# Altium PCB PcbDoc_JavierLopezIniesta_RodrigoMoratilla.PcbDoc (part 1 of 2)
Units mm, origin at the board's own origin, x right, y up, seen from the top; angles counter-clockwise.
Board outline 50 x 50 mm, 4 copper layers (Top Layer, Int1 (GND), Int2 (PWR), Bottom Layer), stack 1.369 mm thick; 104 components, 112 nets, 568 pads, 286 vias.
Unrouted connection lines stored in the file: 2.
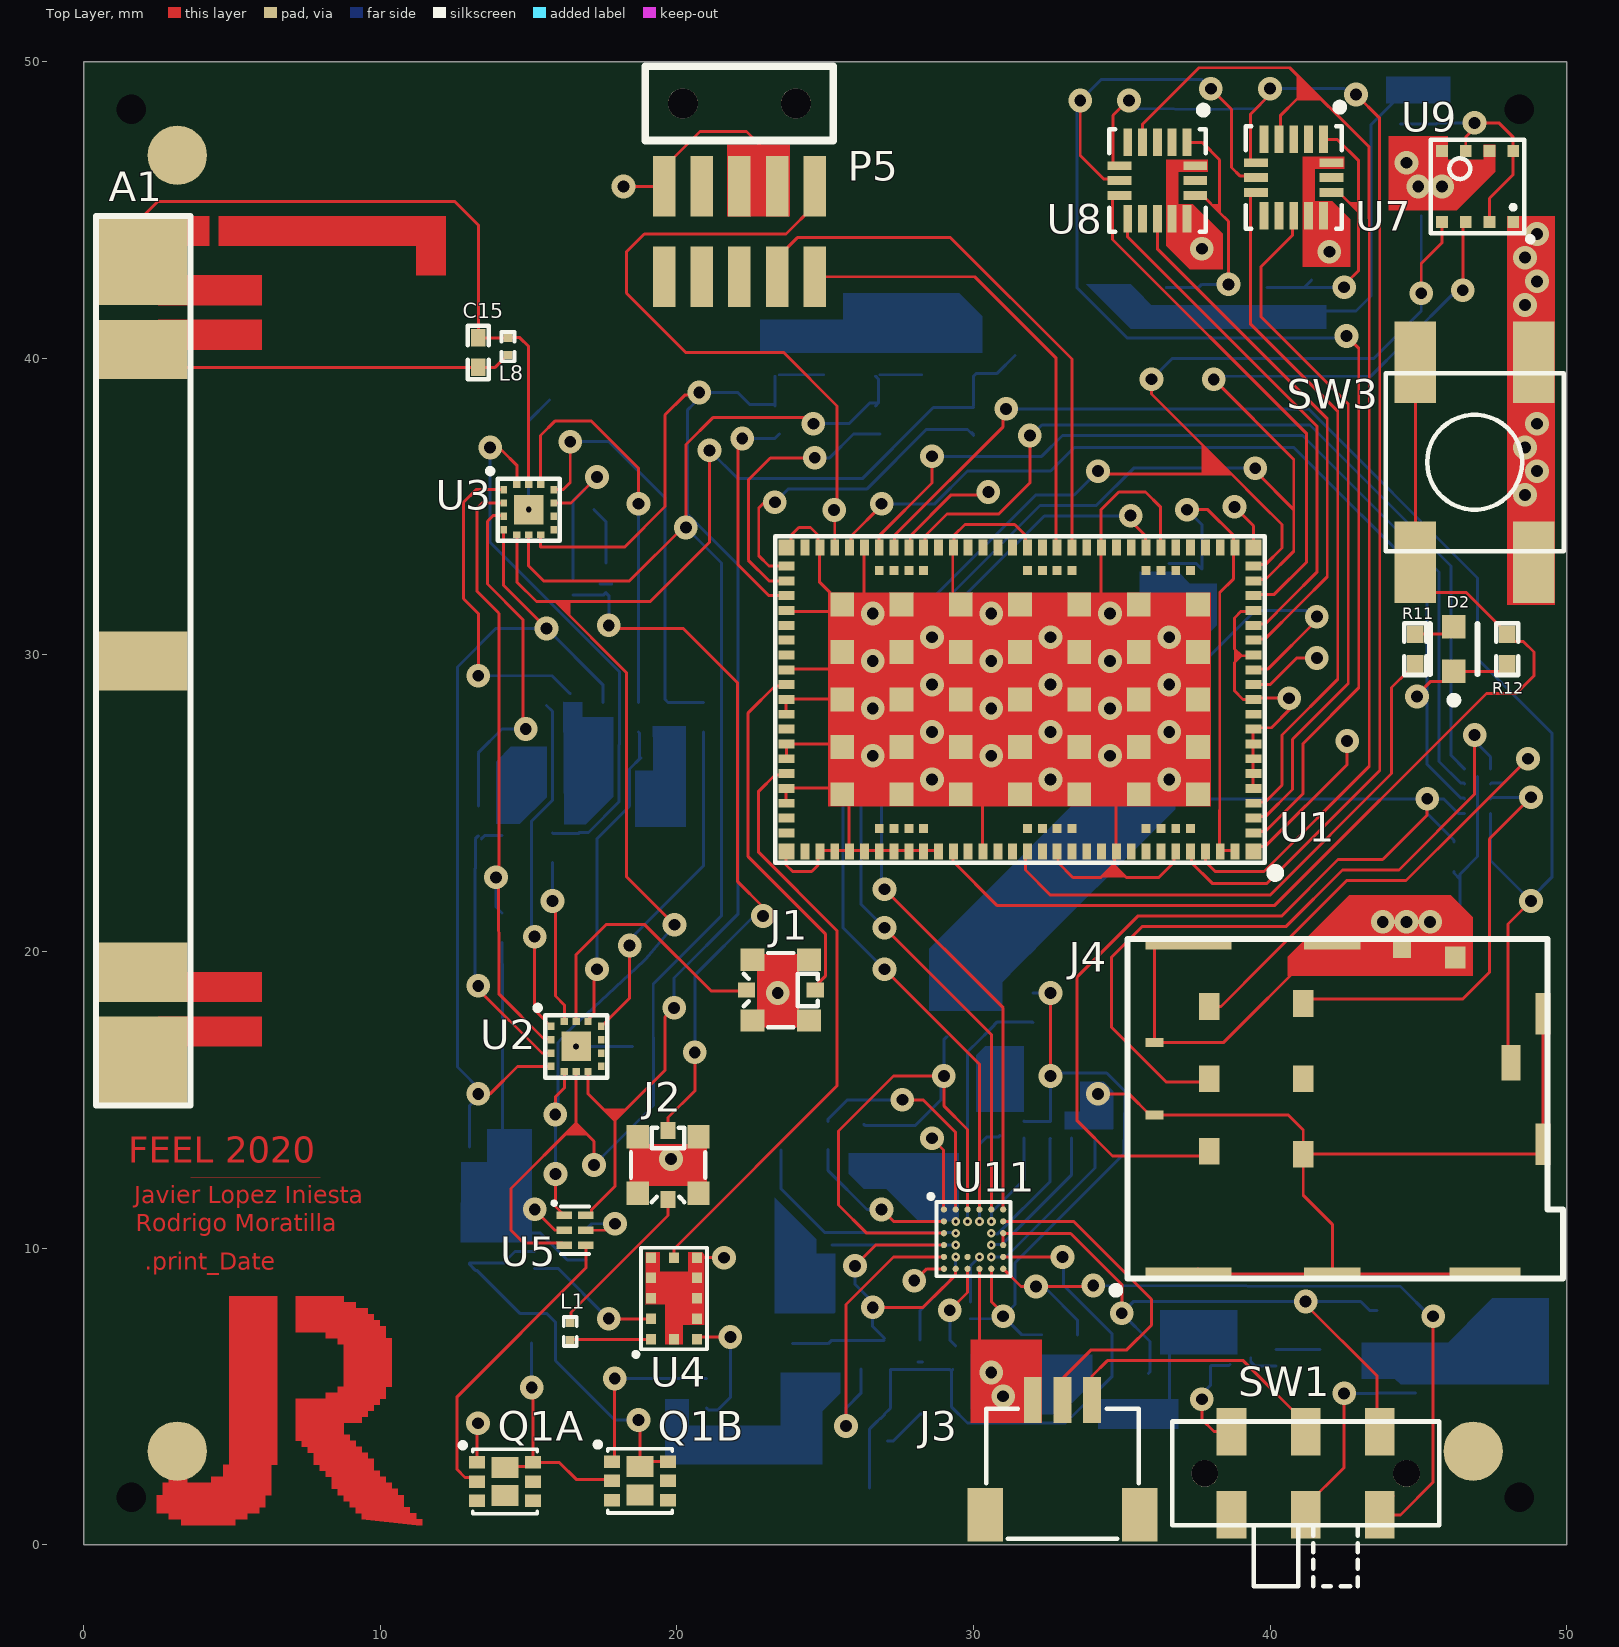
[diagram p0: Top Layer view]
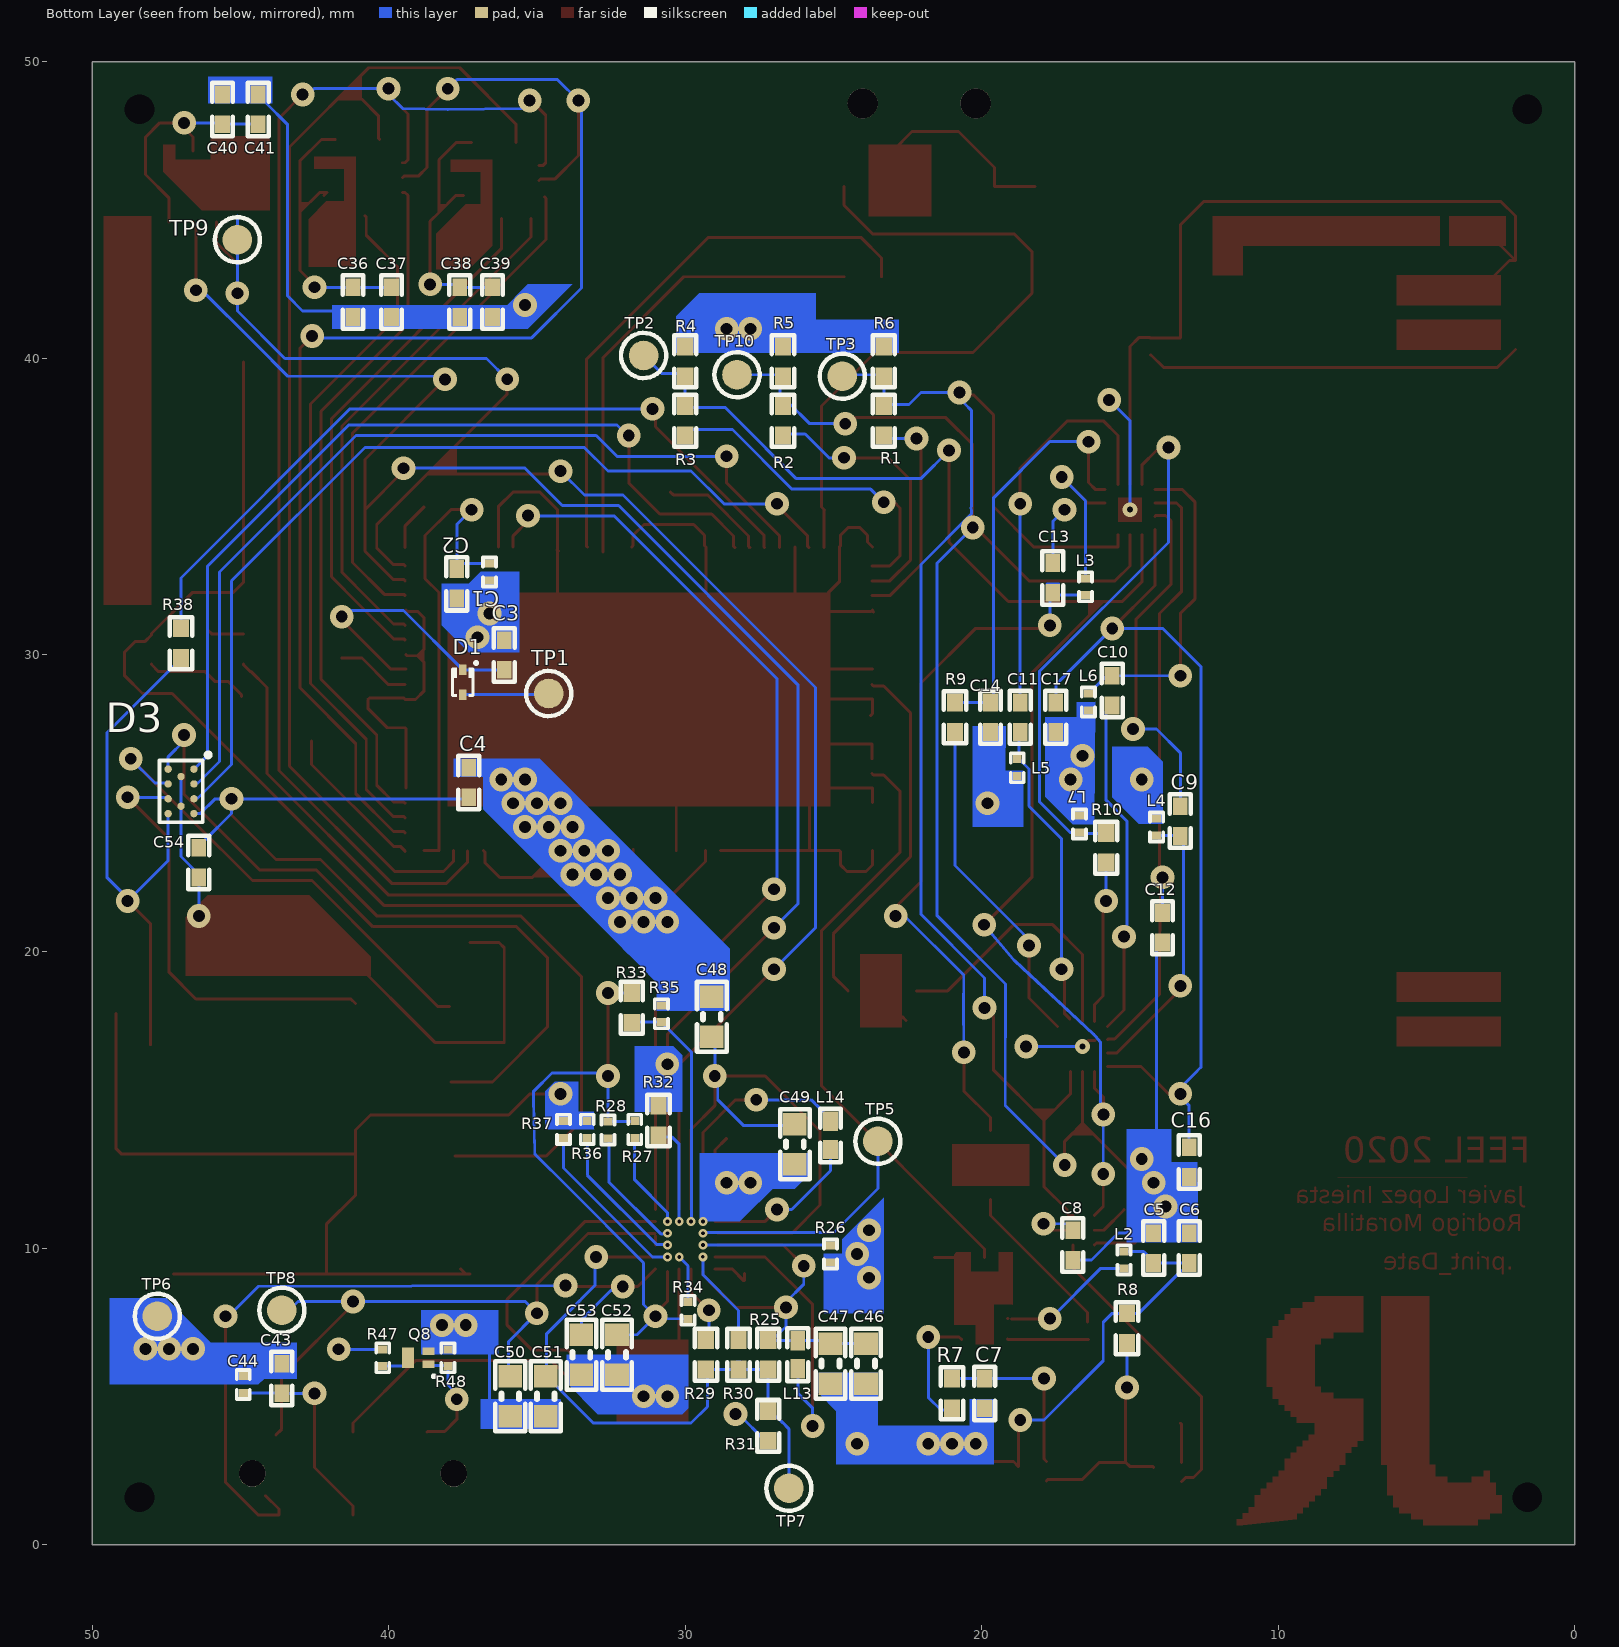
[diagram p1: Bottom Layer view, seen from below]
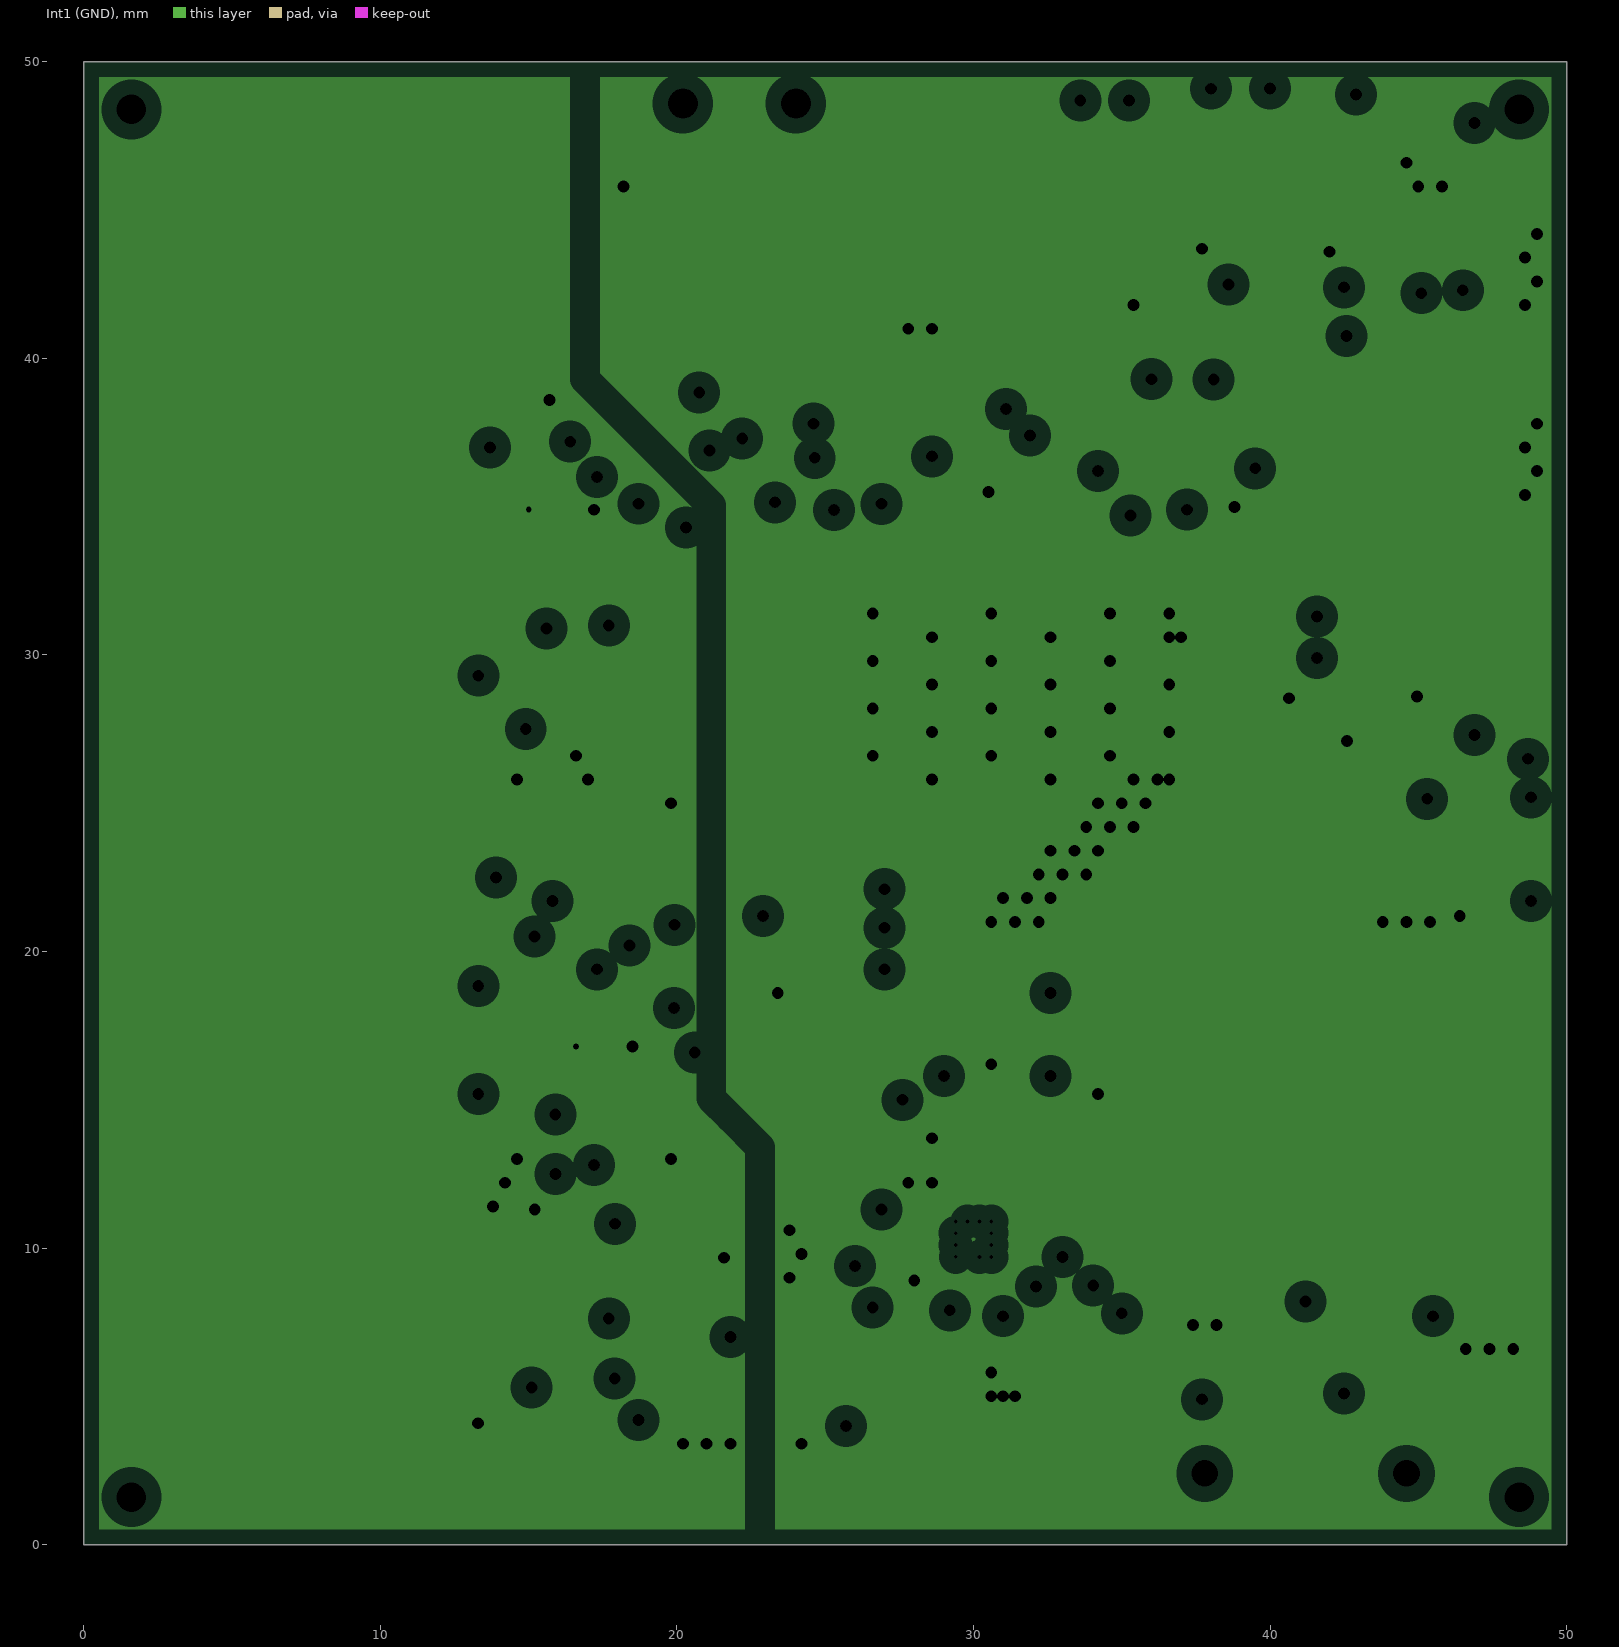
[diagram p2: Int1 (GND), clearances drawn from the general rule]
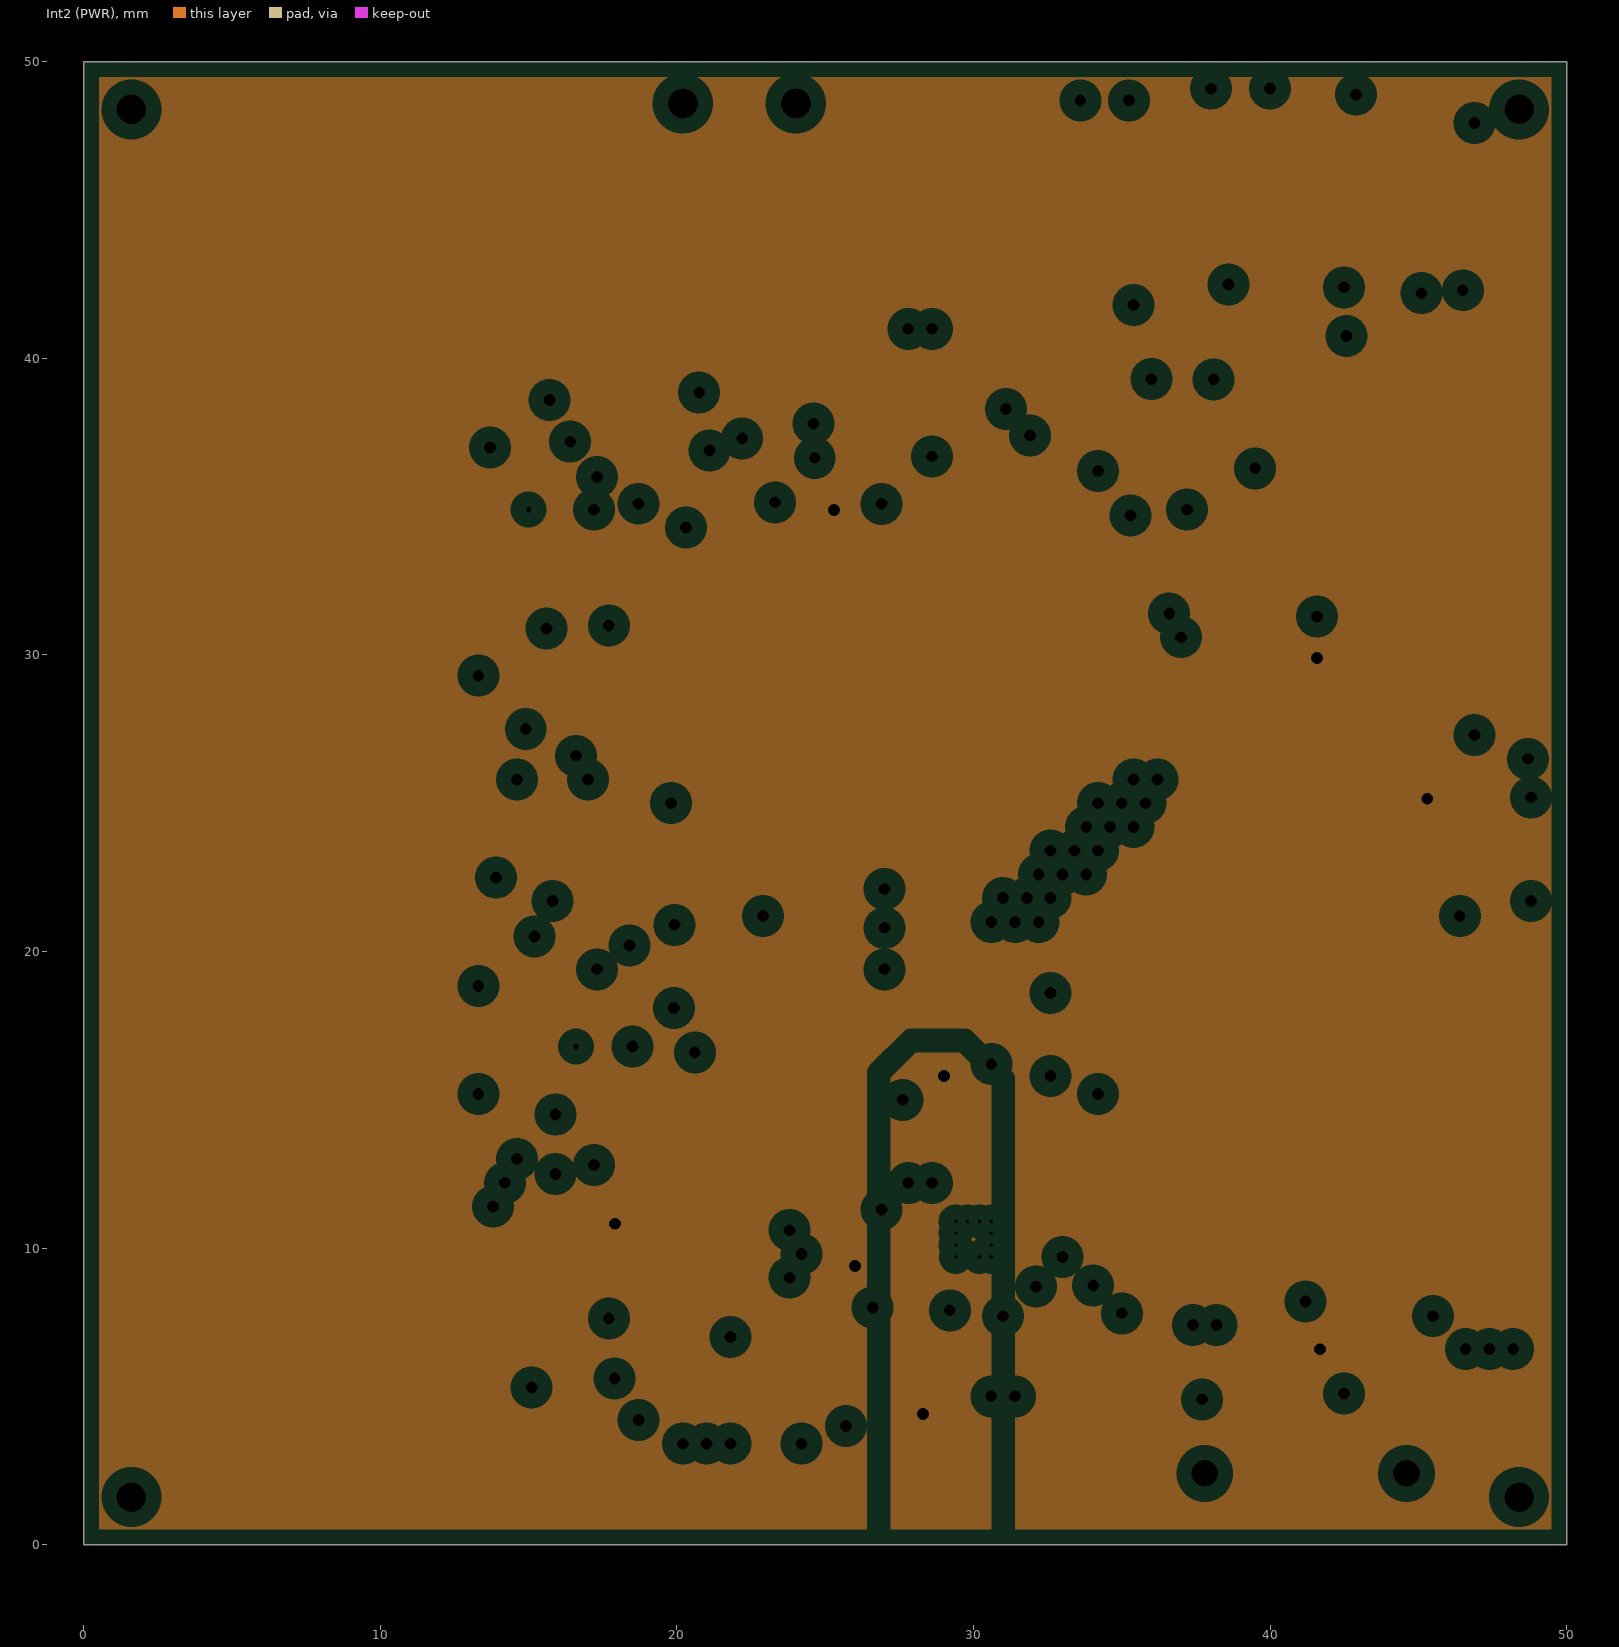
[diagram p3: Int2 (PWR), clearances drawn from the general rule]
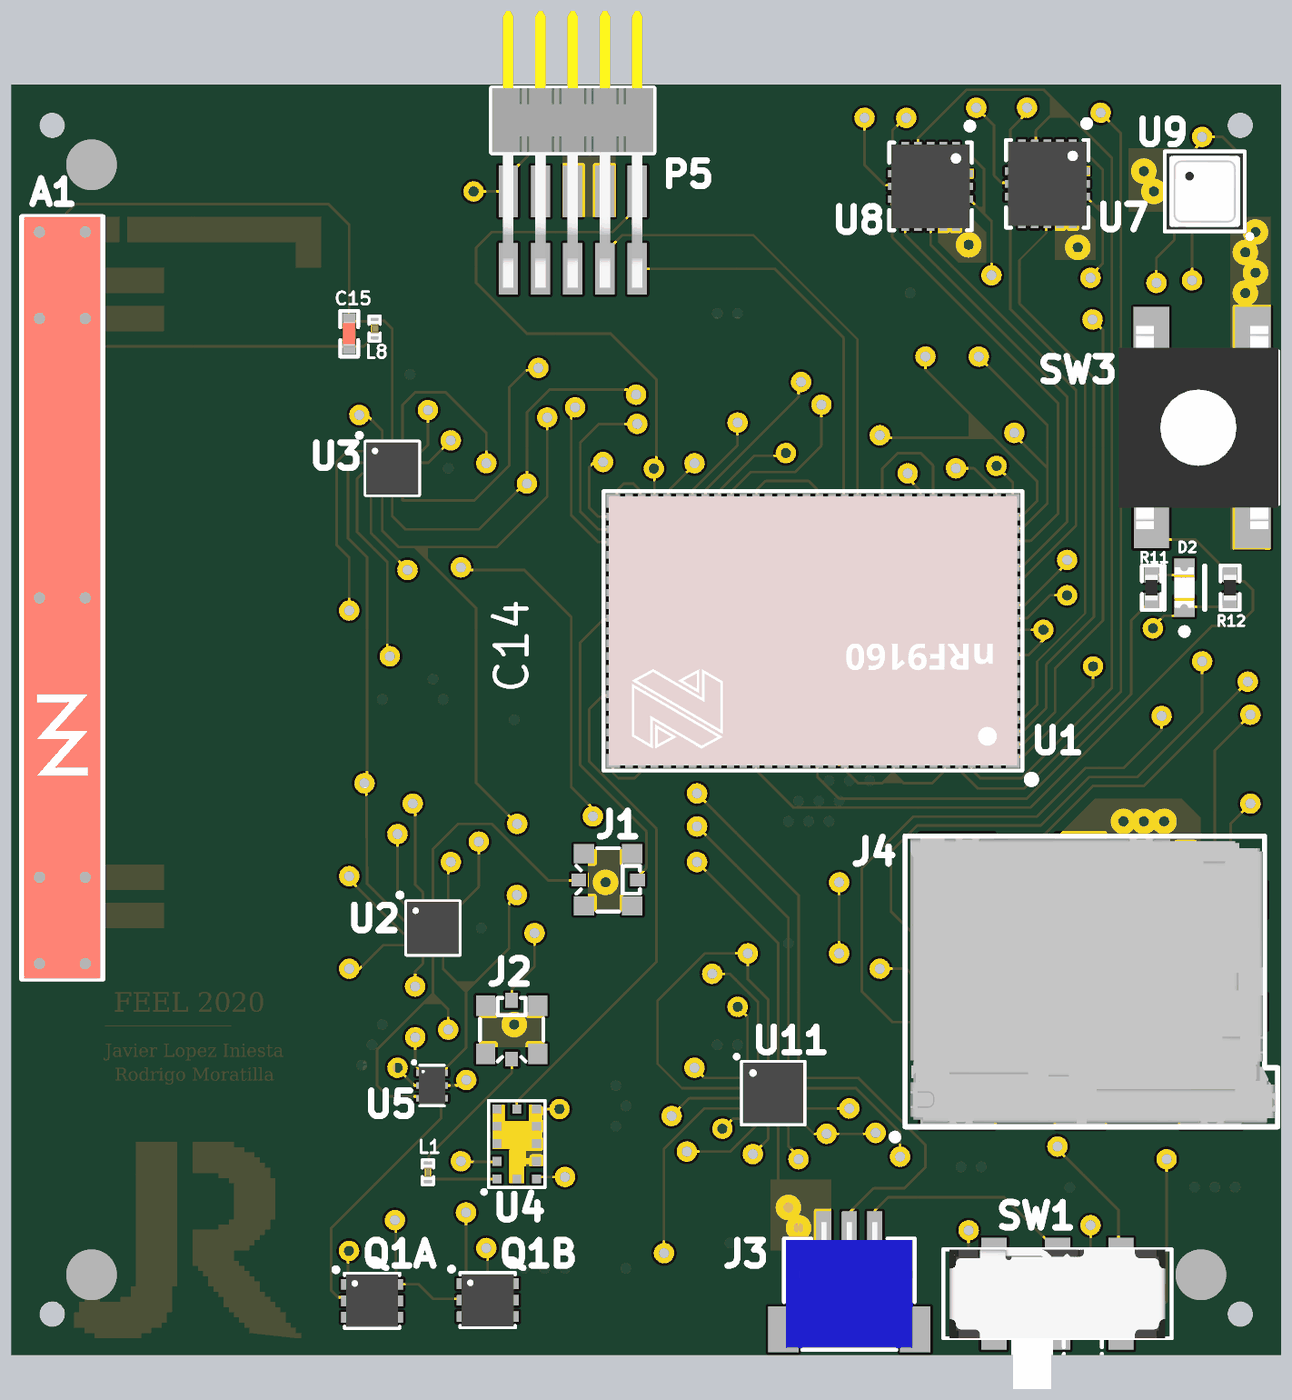
[diagram p5: 3D render of the assembled board from above, using the file's embedded part models]
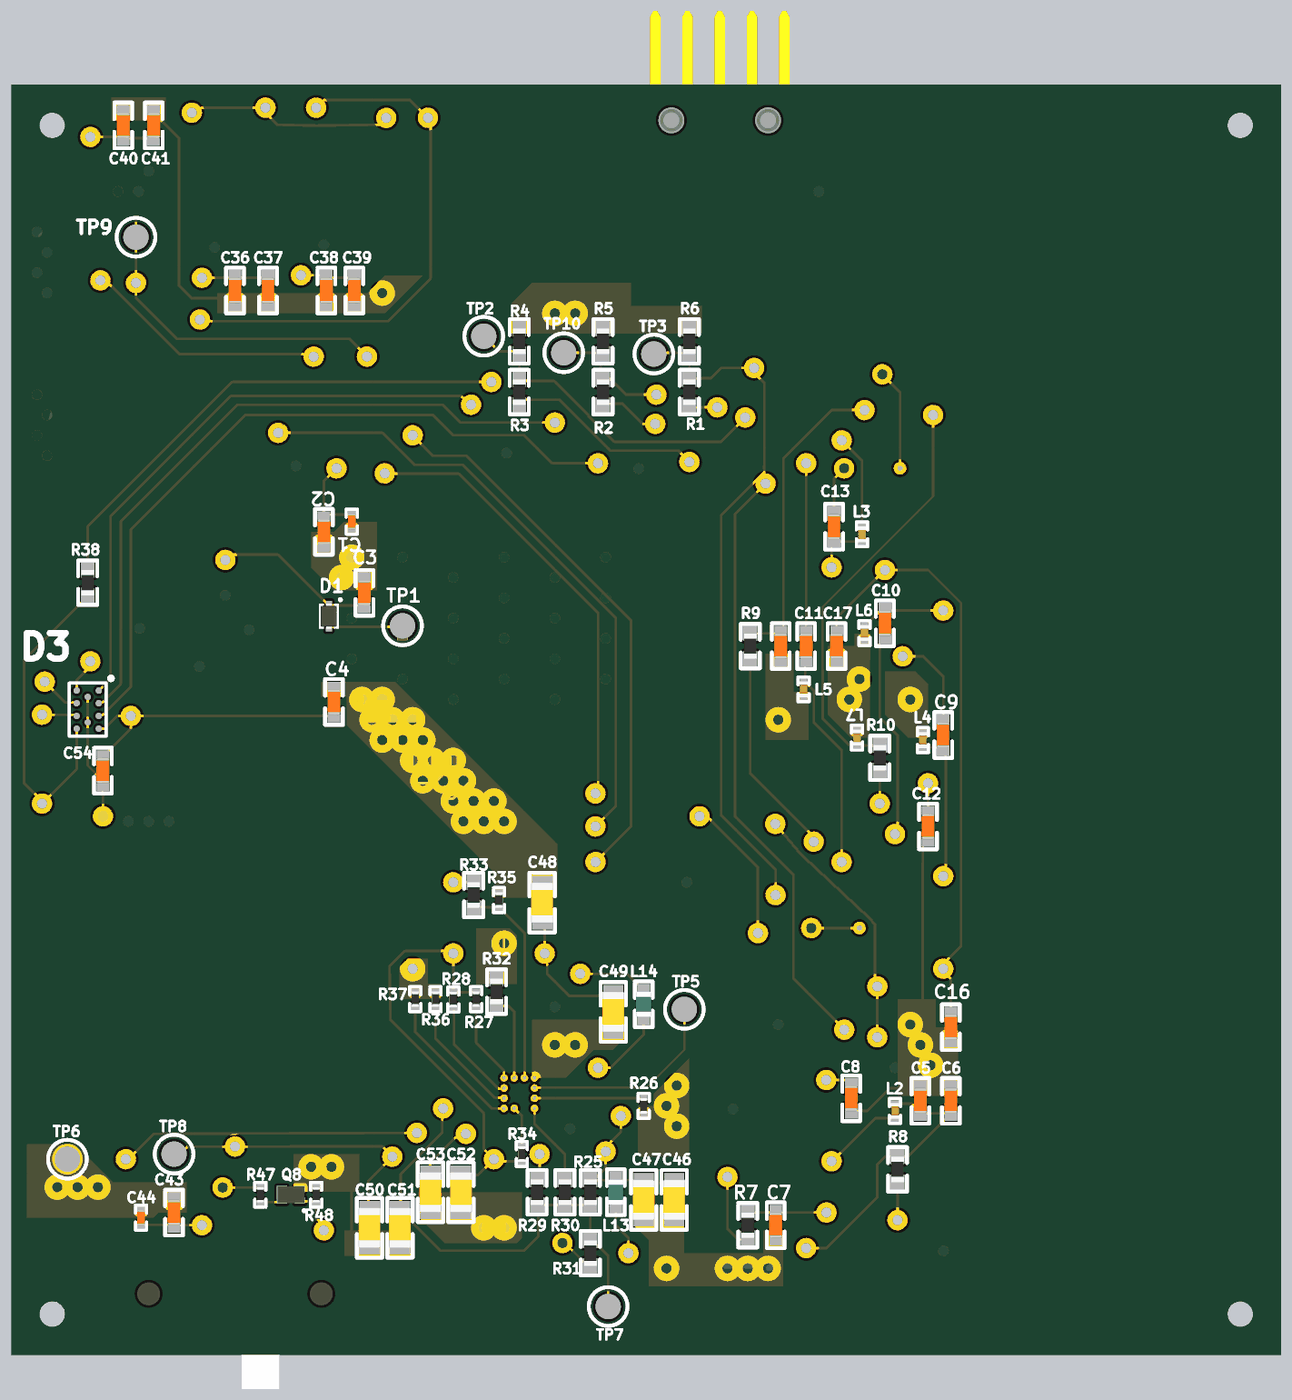
[diagram p6: 3D render of the assembled board from below, using the file's embedded part models]

## Layer stack, top to bottom
Top Solder: solder mask 0.0254, SM-001, Dk 4
Top Layer: signal copper 0.035
Dielectric 1: prepreg 0.1295, PP-017, Dk 4.3
Dielectric 2: prepreg 0.1295, PP-017, Dk 4.3
Int1 (GND): plane copper 0.035, net GND
Dielectric 3: core 0.7112, Core-039, Dk 4.8
Int2 (PWR): plane copper 0.035, net (Multiple Nets)
Dielectric 4: prepreg 0.1295, PP-017, Dk 4.3
Dielectric 5: prepreg 0.1295, PP-017, Dk 4.3
Bottom Layer: signal copper 0.035
Bottom Solder: solder mask 0.0254, SM-001, Dk 4

## Board outline
0,0 0,50 50,50 50,0

## Design rules (kind name [scope] priority, off if disabled: settings)
Clearance [All] p1: gap=0.254 ignorepadtopadclearanceinfootprint=TRUE except(0: Arc-Hole Track-Hole SMDPad-Hole THPad-Hole Via-Hole Fill-Hole Poly-Hole Region-Hole Text-Hole)
DiffPairsRouting [All] p1: maxlimit=0.254 minlimit=0.09 mostfreqgap=0.09 toplayer_minwidth=0.09 toplayer_maxwidth=0.09 toplayer_prefwidth=0.09 bottomlayer_minwidth=0.09 bottomlayer_maxwidth=0.09 bottomlayer_prefwidth=0.09 maxuncoupledlength=12.7
PlaneClearance [All] p1: clearance=0.508
PlaneConnect [All] p1: planeconnectstyle=Direct reliefexpansion=0.508 reliefentries=4 reliefconductorwidth=0.254 reliefairgap=0.254
PolygonConnect [All] p1: connectstyle=Relief reliefconductorwidth=0.254 reliefentries=4 polygonreliefangle="90 Angle" airgapwidth=0.254
RoutingVias [All] p1: holewidth=0.4 width=0.8 viastyle="Through Hole" minholewidth=0.4 minwidth=0.8 maxholewidth=0.4 maxwidth=8.8
SolderMaskExpansion [All] p1: expansion=0.102 istentingtop=FALSE
Width [All] p1: maxlimit=0.1 minlimit=0.1 preferedwidth=0.1 minimp=50.000000 maximp=50.000000 favimp=50.000000
27 further rules are at their usual default settings.

## Classes and differential pairs
component class RF: A1 C5 C6 C7 C8 C9 C11 C12 C13 C14 C15 C16 C17 C54 J2 L1 L3 L4 L5 L6 L7 L8 Q1A Q1B R7 R8 R9 R10 R38 U4 U5
component class nRF9160: 1mm C1 C3 C4 D1 J1 R1 R2 R3 R4 R5 R6 TP1 TP2 TP3 TP10
component class "Leds y Botones": R11 SW3
component class "Interfaz de Programación": P5
component class Alimentacion: C44 C46 C47 C48 C49 C50 C51 C52 C53 J3 L13 L14 R25 R26 R27 R28 R29 R30 R31 R32 R33 R34 R35 R36 R37 R47 R48 SW1 TP5 TP6 TP8 U11
component class Acelerometros: C36 C37 C38 C39 U7

## Components (designator, comment, footprint, x,y, rotation, side; value= is the part's Value field where it differs from the comment)
A1 "FR01-S4-210" FR01-S4-210_DF 2,29.8 r90 top
C1 "4.7uF" CAPC0603X03L_C 36.6,32.8 r90 bottom value=2.2nF
C2 "4.7uF" CAPC1005X04L 37.7,32.4 r90 bottom value=0.3pF
C3 "47uF" CAPC1005X04L 36.1,30 r270 bottom value=0.3pF
C4 "4.7uF" CAPC1005X04L 37.3,25.7 r270 bottom value=0.3pF
C5 "100pF" CAPC1005X04L 14.2,10 r270 bottom value=0.3pF
C6 "100nF" CAPC1005X04L 13,10 r270 bottom value=0.3pF
C7 "6.8pF" CAPC1005X04L 19.9,5.1 r90 bottom value=0.3pF
C8 "100nF" CAPC1005X04L 16.925,10.1 r90 bottom value=0.3pF
C9 "2.5pF" CAPC1005X04L 13.3,24.4 r90 bottom value=0.3pF
C10 "5.5pF" CAPC1005X04L 15.6,28.8 r90 bottom value=0.3pF
C11 "9.2pF" CAPC1005X04L 18.7,27.9 r90 bottom value=0.3pF
C12 "1.5pF" CAPC1005X04L 13.9,20.8 r90 bottom value=0.3pF
C13 "3.9pF" CAPC1005X04L 17.6,32.6 r270 bottom value=0.3pF
C14 "3.1pF" CAPC1005X04L 19.7,27.9 r90 bottom value=0.3pF
C15 "0.3pF" CAPC1005X04L 13.3,40.2 r90 top
C16 "2.2nF" CAPC1005X04L 13,12.9 r90 bottom value=0.3pF
C17 "2.2nF" CAPC1005X04L 17.5,27.9 r90 bottom value=0.3pF
C36 "100 nF" CAPC1005X04L 41.2,41.9 r90 bottom value=0.3pF
C37 "100nF" CAPC1005X04L 39.9,41.9 r90 bottom value=0.3pF
C38 "100nF" CAPC1005X04L 37.6,41.9 r90 bottom value=0.3pF
C39 "100nF" CAPC1005X04L 36.5,41.9 r90 bottom value=0.3pF
C40 "100nF" CAPC1005X04L 45.6,48.4 r270 bottom value=0.3pF
C41 "100nF" CAPC1005X04L 44.4,48.4 r270 bottom value=0.3pF
C43 "10uF" CAPC1005X04L 43.6,5.6 r270 bottom value=0.3pF
C44 "100nF" CAPC0603X03L_C 44.9,5.4 r270 bottom value=2.2nF
C46 "22uF" CAPC1608X06L 23.9,6.1 r90 bottom value=4.7µF
C47 "1.0uF" CAPC1608X06L 25.1,6.1 r90 bottom value=4.7µF
C48 "22uF" CAPC1608X06L 29.1,17.8 r270 bottom value=4.7µF
C49 "1.0uF" CAPC1608X06L 26.3,13.5 r90 bottom value=4.7µF
C50 "4.7uF" CAPC1608X06L 35.9,5 r90 bottom value=4.7µF
C51 "10uF" CAPC1608X06L 34.7,5 r90 bottom value=4.7µF
C52 "1.0uF" CAPC1608X06L 32.3,6.4 r90 bottom value=4.7µF
C53 "2.2uF" CAPC1608X06L 33.5,6.4 r90 bottom value=4.7µF
C54 "10nF" CAPC1005X04L 46.4,23 r90 bottom value=0.3pF
D1 "NSR0620P2T5G" SODFL100X40-2N 37.5,29.08 r270 bottom
D2 "LTST-C190GKT" FP-LTST-C190GKT-MFG 46.2,30.2 r90 top
D3 "CM1402" CM1402 47,25.4 r270 bottom
J1 "MM8130-2600" COAXIAL-SWF 23.5,18.7 r90 top
J2 "MM8130-2600" COAXIAL-SWF 19.7,12.8 r180 top
J3 "HDR-3, 1mm" SM03B-SRSS-TB 33,4.875 r0 top
J4 "SF72S006VBAR2500" SF72S006VBAR2500 35.35,9.125 r270 top
L1 "3.3nH" INDC0603X03L_C 16.4,7.185 r90 top value=5.6nH
L2 "5.6nH" INDC0603X03L_C 15.2,9.6 r90 bottom
L3 "2.9nH" INDC0603X03L_C 16.5,32.3 r90 bottom value=5.6nH
L4 "N.C." INDC0603X03L_C 14.1,24.2 r270 bottom value=5.6nH
L5 "6.2nH" INDC0603X03L_C 18.8,26.2 r90 bottom value=5.6nH
L6 "5.1nH" INDC0603X03L_C 16.4,28.415 r90 bottom value=5.6nH
L7 "4.7nH" INDC0603X03L_C 16.7,24.3 r270 bottom value=5.6nH
L8 "15nH" INDC0603X03L_C 14.3,40.4 r270 top value=5.6nH
L13 "2.2uH" INDC1005X04L 26.2,6.4 r90 bottom value=15nH
L14 "2.2uH" INDC1005X04L 25.1,13.8 r90 bottom value=15nH
P5 "Pin Header 2x5" HDR_2x5-SMD-1.27mm-ANG 22.105,44.28 r180 top
Q1A "TSM250N02DCQ RFG" DFN65P200X200X80_HS-6N 14.2,2.125 r0 top
Q1B "TSM250N02DCQ RFG" DFN65P200X200X80_HS-6N 18.755,2.15 r0 top
Q8 "RV2C010UNT2L" DFN65P100X40-3L 39,6.3 r0 bottom
R1 "1k" RESC1005X04L 23.3,37.9 r90 bottom value=7R15
R2 "1k" RESC1005X04L 26.7,37.9 r90 bottom value=7R15
R3 "1k" RESC1005X04L 30,37.9 r90 bottom value=7R15
R4 "1M0" RESC1005X04L 30,39.9 r270 bottom value=7R15
R5 "1M0" RESC1005X04L 26.7,39.9 r270 bottom value=7R15
R6 "1M0" RESC1005X04L 23.3,39.9 r270 bottom value=7R15
R7 "3k" RESC1005X04L 21,5.1 r270 bottom value=7R15
R8 "1M0" RESC1005X04L 15.1,7.3 r270 bottom value=7R15
R9 "0R" RESC1005X04L 20.9,27.9 r90 bottom value=7R15
R10 "0R" RESC1005X04L 15.8,23.5 r90 bottom value=7R15
R11 "120" RESC1005X04L 44.9,30.2 r270 top value=7R15
R12 "180" RESC1005X04L 48,30.2 r90 top value=7R15
R25 "2R2" RESC1005X04L 27.2,6.4 r270 bottom value=7R15
R26 "N.C." RESC0603X03L_C 25.1,9.8 r90 bottom value=3k
R27 "10k" RESC0603X03L_C 31.7,14 r270 bottom value=3k
R28 "10k" RESC0603X03L_C 32.6,13.985 r270 bottom value=3k
R29 "N.C." RESC1005X04L 29.3,6.4 r90 bottom value=7R15
R30 "1M0" RESC1005X04L 28.2,6.4 r90 bottom value=7R15
R31 "2R2" RESC1005X04L 27.2,4 r90 bottom value=7R15
R32 "1M0" RESC1005X04L 30.9,14.3 r270 bottom value=7R15
R33 "N.C." RESC1005X04L 31.8,18.1 r90 bottom value=7R15
R34 "10k" RESC0603X03L_C 29.9,7.9 r270 bottom value=3k
R35 "10k" RESC0603X03L_C 30.8,17.9 r270 bottom value=3k
R36 "10k" RESC0603X03L_C 33.3,14 r270 bottom value=3k
R37 "10k" RESC0603X03L_C 34.1,14 r270 bottom value=3k
R38 "0R" RESC1005X04L 47,30.4 r270 bottom value=7R15
R47 "1k" RESC0603X03L_C 40.2,6.3 r90 bottom value=3k
R48 "10M" RESC0603X03L_C 38,6.3 r270 bottom value=3k
SW1 "Switch" Switch-Slide-RA-J-Lead-DPDT-8.5x3.5mm 41.2,2.4 r0 top
SW3 "PB SW" Switch-PB-6.2x6.3mm-SMD 46.9,36.5 r90 top
TP1 "Ø1.0mm,SMD" TP_SMD_Ø1.0mm 34.6,28.7 r180 bottom
TP2 "Ø1.0mm,SMD" TP_SMD_Ø1.0mm 31.4,40.1 r180 bottom
TP3 "Ø1.0mm,SMD" TP_SMD_Ø1.0mm 24.7,39.4 r180 bottom
TP5 "Ø1.0mm,SMD" TP_SMD_Ø1.0mm 23.5,13.6 r180 bottom
TP6 "Ø1.0mm,SMD" TP_SMD_Ø1.0mm 47.8,7.7 r180 bottom
TP7 "Ø1.0mm,SMD" TP_SMD_Ø1.0mm 26.5,1.9 r180 bottom
TP8 "Ø1.0mm,SMD" TP_SMD_Ø1.0mm 43.6,7.9 r180 bottom
TP9 "Ø1.0mm,SMD" TP_SMD_Ø1.0mm 45.1,44 r180 bottom
TP10 "Ø1.0mm,SMD" TP_SMD_Ø1.0mm 28.25,39.45 r180 bottom
U1 "nRF9160-SICA" LGA50P1600X1050X104-161N 31.57,28.5 r180 top
U2 "QM12038" UFQFN40P200X200X65_HS-15N 16.6,16.8 r0 top
U3 "QM12038" UFQFN40P200X200X65_HS-15N 15,34.9 r0 top
U4 "QM14501" QM14501 19.9,8.3 r90 top
U5 "NC7SV11L6X" DFN1410-6N 16.563,10.6 r0 top
U7 "ADXL372" LGA50P322X300X114-16N 40.8,46.1 r270 top
U8 "ADXL362" LGA50P322X300X114-16N 36.2,46 r270 top
U9 "BME680" BME680 47,45.8 r270 top
U11 "ADP536x" BGA32C40P6X6_238X238X56 30,10.3 r0 top

## Footprints (in the part's own frame and the unit in brackets; to place one, negate y for a bottom-side part, rotate by r counter-clockwise, add the part's x,y. Pads: shape width x height; smd on the part's side, far side on the other; paste and mask are expansions set on the pad)
BGA32C40P6X6_238X238X56 [mm]
  round 0.21 smd: A1(-1,1) A2(-0.6,1) A3(-0.2,1) A4(0.2,1) A5(0.6,1) A6(1,1) B1(-1,0.6) B2(-0.6,0.6) B3(-0.2,0.6) B4(0.2,0.6) B5(0.6,0.6) B6(1,0.6) C1(-1,0.2) C2(-0.6,0.2) C5(0.6,0.2) C6(1,0.2) D1(-1,-0.2) D2(-0.6,-0.2) D5(0.6,-0.2) D6(1,-0.2) E1(-1,-0.6) E2(-0.6,-0.6) E3(-0.2,-0.6) E4(0.2,-0.6) E5(0.6,-0.6) E6(1,-0.6) F1(-1,-1) F2(-0.6,-1) F3(-0.2,-1) F4(0.2,-1) F5(0.6,-1) F6(1,-1)
  silkscreen extent -1.49,-1.25 1.25,1.49, body extent -1.19,-1.19 1.19,1.19, height 0.56
BME680 [mm]
  rect 0.4x0.4 smd: 1(1.2,1.2) 2(1.2,0.4) 3(1.2,-0.4) 4(1.2,-1.2) 5(-1.2,-1.2) 6(-1.2,-0.4) 7(-1.2,0.4) 8(-1.2,1.2)
  silkscreen extent -1.57,-1.57 1.82,1.83, body extent -1.5,-1.5 1.5,1.5, height 0.93
CAPC0603X03L_C [mm]
  rect 0.27x0.3 smd: 1(-0.285,0) 2(0.285,0)
  silkscreen extent -0.49,-0.22 0.49,0.22, body extent -0.3,-0.15 0.3,0.15, height 0.3
CAPC1005X04L [mm]
  rect 0.6x0.5 smd: 1(-0.5,0) 2(0.5,0)
  silkscreen extent -0.9,-0.35 0.9,0.35, body extent -0.51,-0.25 0.51,0.25, height 0.5
CAPC1608X06L [mm]
  rect 0.75x0.8 smd: 1(-0.675,0) 2(0.675,0)
  silkscreen extent -1.17,-0.5 1.18,0.5, body extent -0.8,-0.43 0.8,0.43, height 0.8
CM1402 [mm]
  round 0.25 smd: A1(-0.75,0.435) A2(-0.25,0.435) A3(0.25,0.435) A4(0.75,0.435) B1(-0.5,0) B2(0.5,0) C1(-0.75,-0.435) C2(-0.25,-0.435) C3(0.25,-0.435) C4(0.75,-0.435)
  silkscreen extent -1.28,-0.73 1.04,0.96, body extent -0.98,-0.66 0.98,0.66, height 0.72
COAXIAL-SWF [mm]
  rect 0.5x0.58 smd: 1(0,1.16) 3(0,-1.16)
  rect 0.75x0.8 smd: 2(-1.025,-0.95) 2(-1.025,0.95) 2(1.025,-0.95) 2(1.025,0.95)
  Top Layer pour cut-out: -0.65,0.55 0.65,0.55 0.65,1.35 -0.65,1.35
  Top Layer pour cut-out: 0.65,-0.55 -0.65,-0.55 -0.65,-1.35 0.65,-1.35
  silkscreen extent -1.25,-1.25 1.25,1.25, body extent -1.26,-1.3 1.26,1.3, height 1.55
DFN65P100X40-3L [mm]
  rect 0.4x0.25 smd: 1(-0.35,0.225) 2(-0.35,-0.225)
  rect 0.4x0.7 smd: 3(0.35,0)
  silkscreen extent -0.57,0.58 -0.48,0.67, body extent -0.52,-0.33 0.52,0.32, height 0.4
DFN65P200X200X80_HS-6N [mm]
  rect 0.55x0.42 smd: 1(-0.945,0.65) 2(-0.945,0) 3(-0.945,-0.65) 4(0.945,-0.65) 5(0.945,0) 6(0.945,0.65)
  rect 0.92x0.71 smd: 3(0,-0.475) 6(0,0.475)
  silkscreen extent -1.47,-1.08 1.08,1.27, body extent -1.03,-1.02 1.03,1.03, height 0.8
DFN1410-6N [mm]
  rect 0.525x0.25 smd: 1(-0.363,0.5) 2(-0.363,0) 3(-0.363,-0.5) 4(0.363,-0.5) 5(0.363,0) 6(0.363,0.5)
  silkscreen extent -0.76,-0.8 0.47,0.96, body extent -0.53,-0.72 0.53,0.73, height 0.4
FP-LTST-C190GKT-MFG [mm]
  rect 0.8x0.8 smd: 1(-0.75,0) 2(0.75,0)
  silkscreen extent -1.85,-0.8 0.85,0.8, body extent -0.8,-0.4 0.8,0.4, height 0.8
FR01-S4-210_DF [mm]
  rect 2x3 smd: 0(0,0) 2(10.5,0) 4(-10.5,0)
  rect 3x3 smd: 1(13.5,0) 3(-13.5,0)
  Top Layer region: 15,-2.242 15,-0.312 14,-0.312 14,-2.242
  Top Layer region: 14,-2.547 15,-2.547 15,-10.022 14,-10.022
  Top Layer region: 13,-0.5 12,-0.5 12,-4 13,-4
  Top Layer region: 11.5,-0.5 10.5,-0.5 10.5,-4 11.5,-4
  Top Layer region: -12,-0.5 -13,-0.5 -13,-4 -12,-4
  Top Layer region: -10.5,-0.5 -11.5,-0.5 -11.5,-4 -10.5,-4
  Top Layer pour cut-out: -25,2 15.4,2 15.4,-10.5 -25,-10.5
  Top Layer region: 15,-9.2 15,-10.2 13,-10.2 13,-9.2
  Bottom Layer pour cut-out: -25,2 15.4,2 15.4,-10.5 -25,-10.5
  silkscreen extent -15,-1.6 15,1.6, body extent -15,-1.5 15,1.5, height 1
HDR_2x5-SMD-1.27mm-ANG [mm]
  round 1.02 hole 1.02 unplated: 0(-1.905,-4.32) 0(1.905,-4.32)
  rect 0.76x2.03 smd: 1(-2.54,-1.525) 2(-2.54,1.525) 3(-1.27,-1.525) 4(-1.27,1.525) 5(0,-1.525) 6(0,1.525) 7(1.27,-1.525) 8(1.27,1.525) 9(2.54,-1.525) 10(2.54,1.525)
  silkscreen extent -3.17,-5.57 3.17,-3.07, body extent -3.18,-8.63 3.17,2.27, height 3.41
INDC0603X03L_C [mm]
  rect 0.27x0.3 smd: 1(-0.285,0) 2(0.285,0)
  silkscreen extent -0.49,-0.22 0.49,0.22, body extent -0.31,-0.16 0.31,0.16, height 0.26
INDC1005X04L [mm]
  rect 0.65x0.5 smd: 1(-0.475,0) 2(0.475,0)
  silkscreen extent -0.9,-0.35 0.9,0.35, body extent -0.5,-0.3 0.5,0.3, height 0.5
LGA50P322X300X114-16N [mm]
  rect 0.925x0.3 smd: 1(-1.287,1) 2(-1.287,0.5) 3(-1.287,0) 4(-1.287,-0.5) 5(-1.287,-1) 9(1.288,-1) 10(1.288,-0.5) 11(1.288,0) 12(1.288,0.5) 13(1.288,1)
  rect 0.3x0.8 smd: 6(-0.5,-1.275) 7(0,-1.275) 8(0.5,-1.275) 14(0.5,1.275) 15(0,1.275) 16(-0.5,1.275)
  silkscreen extent -2.5,-1.62 1.73,1.68, body extent -1.65,-1.55 1.65,1.55, height 1.14
LGA50P1600X1050X104-161N [mm]
  rect 0.54x0.54 smd: 1(-7.87,5.12) 21(-7.87,-5.12) 52(7.87,-5.12) 72(7.87,5.12)
  rect 0.54x0.3 smd: 2(-7.87,4.5) 3(-7.87,4) 4(-7.87,3.5) 5(-7.87,3) 6(-7.87,2.5) 7(-7.87,2) 8(-7.87,1.5) 9(-7.87,1) 10(-7.87,0.5) 11(-7.87,0) 12(-7.87,-0.5) 13(-7.87,-1) 14(-7.87,-1.5) 15(-7.87,-2) 16(-7.87,-2.5) 17(-7.87,-3) 18(-7.87,-3.5) 19(-7.87,-4) 20(-7.87,-4.5) 53(7.87,-4.5) 54(7.87,-4) 55(7.87,-3.5) 56(7.87,-3) 57(7.87,-2.5) 58(7.87,-2) 59(7.87,-1.5) 60(7.87,-1) 61(7.87,-0.5) 62(7.87,0) 63(7.87,0.5) 64(7.87,1) 65(7.87,1.5) 66(7.87,2) 67(7.87,2.5) 68(7.87,3) 69(7.87,3.5) 70(7.87,4) 71(7.87,4.5)
  rect 0.3x0.54 smd: 22(-7.25,-5.12) 23(-6.75,-5.12) 24(-6.25,-5.12) 25(-5.75,-5.12) 26(-5.25,-5.12) 27(-4.75,-5.12) 28(-4.25,-5.12) 29(-3.75,-5.12) 30(-3.25,-5.12) 31(-2.75,-5.12) 32(-2.25,-5.12) 33(-1.75,-5.12) 34(-1.25,-5.12) 35(-0.75,-5.12) 36(-0.25,-5.12) 37(0.25,-5.12) 38(0.75,-5.12) 39(1.25,-5.12) 40(1.75,-5.12) 41(2.25,-5.12) 42(2.75,-5.12) 43(3.25,-5.12) 44(3.75,-5.12) 45(4.25,-5.12) 46(4.75,-5.12) 47(5.25,-5.12) 48(5.75,-5.12) 49(6.25,-5.12) 50(6.75,-5.12) 51(7.25,-5.12) 73(7.25,5.12) 74(6.75,5.12) 75(6.25,5.12) 76(5.75,5.12) 77(5.25,5.12) 78(4.75,5.12) 79(4.25,5.12) 80(3.75,5.12) 81(3.25,5.12) 82(2.75,5.12) 83(2.25,5.12) 84(1.75,5.12) 85(1.25,5.12) 86(0.75,5.12) 87(0.25,5.12) 88(-0.25,5.12) 89(-0.75,5.12) 90(-1.25,5.12) 91(-1.75,5.12) 92(-2.25,5.12) 93(-2.75,5.12) 94(-3.25,5.12) 95(-3.75,5.12) 96(-4.25,5.12) 97(-4.75,5.12) 98(-5.25,5.12) 99(-5.75,5.12) 100(-6.25,5.12) 101(-6.75,5.12) 102(-7.25,5.12)
  rect 0.8x0.8 smd: 103(-6,3.2) 103(-6,-1.6) 103(-6,0) 103(-6,1.6) 103(-6,-3.2) 103(-4,3.2) 103(-4,-1.6) 103(-4,0) 103(-4,1.6) 103(-4,-3.2) 103(-2,1.6) 103(-2,3.2) 103(-2,0) 103(-2,-3.2) 103(-2,-1.6) 103(0,3.2) 103(0,1.6) 103(0,0) 103(0,-1.6) 103(0,-3.2) 103(2,1.6) 103(2,3.2) 103(2,0) 103(2,-3.2) 103(2,-1.6) 103(4,3.2) 103(4,-1.6) 103(4,0) 103(4,1.6) 103(4,-3.2) 103(6,3.2) 103(6,-1.6) 103(6,0) 103(6,1.6) 103(6,-3.2)
  rect 0.3x0.3 smd: 104(-5.75,-4.35) 105(-5.25,-4.35) 106(-4.75,-4.35) 107(-4.25,-4.35) 108(-1.75,-4.35) 109(-1.25,-4.35) 110(-0.75,-4.35) 111(-0.25,-4.35) 112(3.25,-4.35) 113(3.75,-4.35) 114(4.25,-4.35) 115(4.75,-4.35) 116(4.75,4.35) 117(4.25,4.35) 118(3.75,4.35) 119(3.25,4.35) 120(-0.25,4.35) 121(-0.75,4.35) 122(-1.25,4.35) 123(-1.75,4.35) 124(-4.25,4.35) 125(-4.75,4.35) 126(-5.25,4.35) 127(-5.75,4.35)
  Top Layer pour cut-out: -8.15,5.4 8.15,5.4 8.15,-5.4 -8.15,-5.4
  silkscreen extent -8.75,-5.5 8.25,6, body extent -8.05,-5.3 8.05,5.3, height 1.2
QM14501 [mm]
  rect 0.35x0.35 smd: 1(-1.375,0.775) 2(-1.375,0) 3(-1.375,-0.775) 4(-0.683,-0.775) 5(0.009,-0.775) 6(0.701,-0.775) 7(1.375,-0.775) 8(1.375,0) 9(1.375,0.775) 10(0.701,0.775) 11(0.009,0.775) 12(-0.683,0.775)
  Top Layer region: -0.208,-0.95 1.55,-0.95 1.55,-0.474 -0.208,-0.474
  Top Layer region: -1.55,-0.3 -0.15,-0.3 -0.15,0.3 -1.55,0.3
  Top Layer region: -0.733,-0.775 -0.633,-0.775 -0.633,-0.15 -0.733,-0.15
  Top Layer region: -0.208,0.474 1.55,0.474 1.55,0.95 -0.208,0.95
  Top Layer region: -0.208,-0.6 0.9,-0.6 0.9,0.6 -0.208,0.6
  silkscreen extent -1.94,-1.11 1.71,1.34, body extent -1.7,-1.1 1.7,1.1, height 1.01
RESC0603X03L_C [mm]
  rect 0.27x0.3 smd: 1(-0.285,0) 2(0.285,0)
  silkscreen extent -0.49,-0.22 0.49,0.22, body extent -0.3,-0.15 0.3,0.15, height 0.23
RESC1005X04L [mm]
  rect 0.6x0.55 smd: 1(-0.5,0) 2(0.5,0)
  silkscreen extent -0.88,-0.38 0.87,0.37, body extent -0.5,-0.25 0.5,0.25, height 0.3
SF72S006VBAR2500 [mm]
  rect 0.45x1.9 smd: 0(-11.175,6.75) 0(0,6.75)
  rect 0.45x2.9 smd: 0(-11.175,1.9) 0(0,1.9)
  rect 0.75x0.7 smd: 0(-10.675,10.9)
  rect 1.4x0.5 smd: 0(-8.78,13.85) 0(-4.38,13.85)
  rect 0.3x0.6 smd: 0(-7.8,0.75) 0(-5.36,0.75)
  rect 0.45x2.4 smd: 0(0,11.9)
  rect 0.9x0.7 smd: C1(-4.14,2.6) C2(-6.58,2.6) C3(-9.02,2.6) C5(-4.04,5.77) C6(-6.58,5.77) C7(-9.12,5.77)
  rect 0.6x0.6 smd: CSW(-10.95,9.1)
  rect 1.2x0.65 smd: DSW(-7.13,12.775)
  Top Layer pour cut-out: -10.084,9.5 -3.073,9.5 -3.073,-0.025 -10.084,-0.025
  Top Layer pour cut-out: -8.407,13.106 -3.48,13.106 -3.48,9.855 -8.407,9.855
  silkscreen extent -11.3,-0.67 0.67,14.53, body extent -11.2,0.05 0.02,14.4, height 1.25
SM03B-SRSS-TB [mm]
  rect 1.2x1.8 smd: 0(-2.6,-3.875) 0(2.6,-3.875)
  rect 0.6x1.55 smd: 1(-1,0) 2(0,0) 3(1,0)
  silkscreen extent -2.57,-4.68 2.58,-0.3, body extent -2.5,-4.61 2.5,0.34, height 2.95
SODFL100X40-2N [mm]
  rect 0.36x0.25 smd: 1(-0.42,0) 2(0.42,0)
  silkscreen extent -0.7,-0.35 0.5,0.5, body extent -0.5,-0.33 0.5,0.32, height 0.4
Switch-PB-6.2x6.3mm-SMD [mm]
  rect 2.75x1.39 smd: 1(-3.375,2)
  rect 2.75x1.4 smd: 1(3.375,2) 2(-3.375,-2) 2(3.375,-2)
  silkscreen extent -3,-3 3,3, body extent -4,-3 4,3.3, height 3.1
Switch-Slide-RA-J-Lead-DPDT-8.5x3.5mm [mm]
  round 0.9 hole 0.9 unplated: 0(-3.4,0) 0(3.4,0)
  rect 1x1.6 smd: 1(-2.5,-1.4) 2(0,-1.4) 3(2.5,-1.4) 4(-2.5,1.4) 5(0,1.4) 6(2.5,1.4)
  silkscreen extent -4.5,-3.8 4.5,1.75, body extent -4.25,-3.75 4.25,1.75, height 3.5
TP_SMD_Ø1.0mm [mm]
  round 1 smd: 1(0,0)
  silkscreen extent -0.76,-0.76 0.76,0.76
UFQFN40P200X200X65_HS-15N [mm]
  rect 0.23x0.25 smd: 1(-0.845,0.675) 2(-0.845,0.225) 3(-0.845,-0.225) 4(-0.845,-0.675) 8(0.845,-0.675) 9(0.845,-0.225) 10(0.845,0.225) 11(0.845,0.675)
  rect 0.25x0.23 smd: 5(-0.4,-0.845) 6(0,-0.845) 7(0.4,-0.845) 12(0.4,0.845) 13(0,0.845) 14(-0.4,0.845)
  rect 1x1 smd: 15(0,0)
  oval 0.23x0.25 on Top Paste: ""(-0.845,-0.675) ""(-0.845,-0.225) ""(-0.845,0.225) ""(-0.845,0.675) ""(0.845,-0.675) ""(0.845,-0.225) ""(0.845,0.225) ""(0.845,0.675)
  oval 0.25x0.23 on Top Paste: ""(-0.4,-0.845) ""(-0.4,0.845) ""(0,-0.845) ""(0,0.845) ""(0.4,-0.845) ""(0.4,0.845)
  rrect50% 0.85x0.85 on Top Paste: ""(0,0)
  silkscreen extent -1.37,-1.05 1.05,1.37, body extent -1.02,-1.02 1.03,1.03, height 0.65

## Part data
A1: library part Antenna-Dual, "Mobile IoT LTE Multi-Band Antenna", Manufacturer="Fractus Antennas", Part Number=FR01-S4-210-D, Part number IPS=80000001819, Artikkelnr Noca=N.A., ComponentLink1Description=Datasheet, ComponentLink1URL=https://www.fractusantennas.com/wp-content/uploads/2018/01/DS_FR01-S4-210.pdf, ComponentLink2Description="Supplier link", ComponentLink2URL=https://www.fractusantennas.com/trio-mxtend-mobile-iot-antenna/, Footprint Doc=FR01-S4-210, HelpURL=https://www.fractusantennas.com/wp-content/uploads/2018/02/UM_FR01-S4-210.pdf, LatestRevisionDate=2018-07-09, Manufacturer Part Number=FR01-S4-210, Pin Count=5, Published=2018-07-09, Publisher="Nordic Semiconductor"
C1 C44: library part CAP_0201, "Capacitor, X7R, ±10%, 10V", Part Number=C0201-2n2, Part number IPS=00000001778, Artikkelnr Noca=N.A., ComponentLink1Description=Datasheet, ComponentLink2Description="Supplier link", Footprint Doc=0201, LatestRevisionDate=2014-11-13, Note=10V, Pin Count=2, Published=2014-11-13, Publisher="Nordic Semiconductor"
C2 C3 C4 C5 C6 C7 C8 C9 C10 C11 C12 C13 C14 C15 C16 C17 C36 C37 C38 C39 C40 C41 C43 C54: library part CAP_0402, "Capacitor, NP0, ±0.05pF, 50V", Manufacturer=Murata, Manufacturer Part Number=GJM1555C1HR30WB01D, Part Number=C0402-0.3p-HQ-Murata, Part number IPS=00000001777, Supplier Part Number 1=490-11248-1-ND, Artikkelnr Noca=N.A., ComponentLink1Description=Datasheet, ComponentLink2Description="Supplier link", Footprint Doc=0402, HelpURL=https://search.murata.co.jp/Ceramy/image/img/A01X/G101/ENG/GJM1555C1HR30WB01-01.pdf, LatestRevisionDate=2019-01-11, Note=50V, Pin Count=2, Published=2019-01-11, Publisher="Nordic Semiconductor", Supplier 1=Digi-Key, Supplier 2=Mouser, Supplier Part Number 2=81-GJM1555C1HR30WB1D
C46 C47 C48 C49 C50 C51 C52 C53: library part CAP_0603, "Capacitor, X5R, ±10%", Part Number=C0603-4µ7, Part number IPS=00000007783, Artikkelnr Noca=20069060, ComponentLink1Description=Datasheet, ComponentLink2Description="Supplier link", Footprint Doc=0603, LatestRevisionDate=2009-11-23, Note=6.3V, Pin Count=2, Published=2009-05-08, Publisher="Nordic Semiconductor"
D1: "20V schottky barrier diode, Vf 350 mV @ 100 mA, Ir 2.0 µA @ 10 V, If 500 mA", Manufacturer="ON Semiconductor", Part number IPS=00000009952, Supplier Part Number 1=NSR0620P2T5GOSCT-ND, Artikkelnr Noca=10029169, ComponentLink1Description=Datasheet, ComponentLink2Description="Supplier link", Footprint Doc=SOD-923, HelpURL=http://www.onsemi.com/pub_link/Collateral/NSR0620P2-D.PDF, LatestRevisionDate=2016-07-07, Manufacturer Part Number=NSR0620P2T5G, Part Number=NSR0620P2T5G, Pin Count=2, Published=2016-07-07, Publisher="Nordic Semiconductor", Supplier 1=Digi-Key
D2: library part CMP-22017-000005-1, "LED GREEN CLEAR CHIP SMD", Case Code (Imperial)=0603, Case Code (Metric)=1608, Color=Green, Forward Current=30mA, Forward Voltage=2.1V, Lens Color=Colorless, Max Operating Temperature=85°C, Min Operating Temperature=-55°C, Package Quantity=1, Power Dissipation=100mW, Reverse Voltage=5V, Test Current=10mA, Voltage=2V, Case/Package=0603, Depth=0.8mm, Dominant Wavelength=569nm, Height=0.8mm, Illumination Color=Green, Lead Free="Lead Free", Length=1.6mm, Lens Style=Clear, Lens Transparency=Clear, Luminous Intensity=6mcd, Mount="Surface Mount", Number of Elements=1, Number of LEDs=1, Number of Pins=2, Packaging="Tape and Reel", Power Rating=100mW, Radiation Hardening=No, Viewing Angle=130°, Wavelength=565nm, Width=0.8mm
D3: "EMI Network Filter Arrays SIM CARD EMI FILTER WITH ESD PROTECTION", Manufacturer="ON Semiconductor", Manufacturer Part Number=CM1402-03CP, Part number IPS=00000009949, Supplier Part Number 1=CM1402-03CPOSTR-ND, Artikkelnr Noca=N.A., ComponentLink1Description=Datasheet, ComponentLink2Description="Supplier link", Footprint Doc=CM1402, HelpURL=http://www.onsemi.com/pub_link/Collateral/CM1402-D.PDF, LatestRevisionDate=2017-02-06, Part Number=CM1402, Pin Count=10, Published=2017-02-06, Publisher="Nordic Semiconductor", Supplier 1=Digi-Key, Supplier 2=Mouser, Supplier Part Number 2=748-CM1402-03CP
J1 J2: "Coaxial Connector with Switch", Manufacturer=Murata, Part number IPS=00000009955, Supplier Part Number 1=490-4981-1-ND, Artikkelnr Noca=55029011, ComponentLink1Description=Datasheet, ComponentLink2Description="Supplier link", Footprint Doc=COAXIAL-SWF, HelpURL=http://www.murata.com/products/catalog/pdf/o33e.pdf, LatestRevisionDate=2014-04-24, Manufacturer Part Number=MM8130-2600, Part Number=MM8130-2600, Pin Count=3, Published=2014-04-24, Publisher="Nordic Semiconductor", Supplier 1=Digi-Key, Supplier 2=Mouser, Supplier Part Number 2=81-MM8130-2600RA2
J3: library part SM03B-SRSS-TB, "1.0mm pitch connector side entry SMD", Manufacturer=JST, Manufacturer Part Number=SM03B-SRSS-TB(LF)(SN), Part number IPS=00000001785, Supplier Part Number 1=455-1803-1-ND, Artikkelnr Noca=N.A., ComponentLink1Description=Datasheet, ComponentLink2Description="Supplier link", Footprint Doc=SM03B-SRSS-TB, HelpURL=http://www.jst-mfg.com/product/pdf/eng/eSH.pdf, LatestRevisionDate=2017-10-09, Note="JST, Header", Part Number=SM03B-SRSS-TB, Pin Count=3, Published=2017-10-09, Publisher="Nordic Semiconductor", Supplier 1=Digi-Key
J4: "n 8 (6 + 2) Position Card Connector NANO SIM Surface Mount, Right Angle Gold", Manufacturer=JAE, Part number IPS=00000009956, Supplier Part Number 1=670-2799-1-ND, Artikkelnr Noca=N.A., ComponentLink1Description=Datasheet, ComponentLink2Description="Supplier link", Footprint Doc=SF72S006VBAR2500, HelpURL=http://jae-connectors.com/en/pdf/MB-0282-1E_SF72.pdf, LatestRevisionDate=2016-09-09, Manufacturer Part Number=SF72S006VBAR2500, Part Number=SF72S006VBAR2500, Pin Count=8, Published=2016-09-09, Publisher="Nordic Semiconductor", Supplier 1=Digi-Key, Supplier 2=Mouser, Supplier Part Number 2=656-SF72S006VBAR2500
L1 L2 L3 L4 L5 L6 L7 L8: library part IND_0201, "Inductor, 350mA, ±3%", Manufacturer=Murata, Manufacturer Part Number=LQP03TN5N6H02D, Part Number=L0201-5n6, Part number IPS=00000001416, Artikkelnr Noca=N.A., ComponentLink1Description=Datasheet, ComponentLink2Description="Supplier link", Footprint Doc=0201, LatestRevisionDate=2013-04-10, Pin Count=2, Published=2013-04-10, Publisher="Nordic Semiconductor"
L13 L14: library part IND_0402, "Inductor, 320mA, ±5%", Manufacturer="Taiyo Yuden", Manufacturer Part Number=HK100515NJ-T, Part Number=L0402-15n, Part number IPS=00000001262, Supplier Part Number 1=587-1521-1-ND, Artikkelnr Noca=33029323, ComponentLink1Description=Datasheet, ComponentLink2Description="Supplier link", Footprint Doc=0402, HelpURL=http://www.yuden.co.jp/productdata/catalog/en/mlci04_e.pdf, LatestRevisionDate=2012-09-19, Note="High frequency chip inductor ±10%", Pin Count=2, Published=2010-07-12, Publisher="Nordic Semiconductor", Supplier 1=Digi-Key, Supplier 2=Farnell, Supplier Part Number 2=658-1328
P5: library part "Pin Header 2x5 SMD, 1.27mm, Angled", "Pin Header 2x5, 1.27mm (50mil)", Manufacturer=Samtec, Manufacturer Part Number=FTSH-105-01-L-DH-A-C-TR, Part number IPS=00000007800, Artikkelnr Noca=N.A., ComponentLink1Description=Datasheet, ComponentLink2Description="Supplier link", Footprint Doc=HDR_2x5-SMD-1.27mm-ANG, HelpURL=http://www.samtec.com/documents/webfiles/pdf/FTSH_SMT.PDF, LatestRevisionDate=2014-01-22, Part Number="Pin Header 2x5 SMD, 1.27mm, Angled", Pin Count=10, Published=2014-01-22, Publisher="Nordic Semiconductor", Supplier 1=Samtec, Supplier Part Number 1=FTSH-105-01-L-DH-A-C-TR
Q1A Q1B: "Dual N Ch MOFET, 5.8A, 55mOhm max, 620mW", Manufacturer="Taiwan Semiconductor", Part number IPS=00000001703, Supplier Part Number 1=TSM250N02DCQRFGCT-ND, Artikkelnr Noca=N.A., ComponentLink1Description=Datasheet, ComponentLink1URL=https://www.taiwansemi.com/products/datasheet/TSM250N02D_B15.pdf, ComponentLink2Description="Supplier link", Footprint Doc=VDFN-6, HelpURL=https://www.taiwansemi.com/products/datasheet/TSM250N02D_B15.pdf, LatestRevisionDate=2018-10-31, Manufacturer Part Number="TSM250N02DCQ RFG", Part Number="TSM250N02DCQ RFG", Pin Count=6, Published=2018-10-31, Publisher="Nordic Semiconductor", Supplier 1=Digi-Key
Q8: "N-Channel MOSFET, 20V, 1A, 470mOhm, 400mW", Manufacturer="Rohm Semiconductor", Part number IPS=N.A., Supplier Part Number 1=RV2C010UNT2LCT-ND, Artikkelnr Noca=35010020, ComponentLink1Description=Datasheet, ComponentLink2Description="Supplier link", Footprint Doc=DFN-3, HelpURL=http://rohmfs.rohm.com/en/products/databook/datasheet/discrete/transistor/mosfet/rv2c010unt2l-e.pdf, LatestRevisionDate=2016-08-09, Manufacturer Part Number=RV2C010UNT2L, Part Number=RV2C010UNT2L, Pin Count=3, Published=2016-08-09, Publisher="Nordic Semiconductor", Supplier 1=Digi-Key, Supplier 2=Mouser, Supplier Part Number 2=755-RV2C010UNT2L
R1 R2 R3 R4 R5 R6 R7 R8 R9 R10 R11 R12 R25 R29 R30 R31 R32 R33 R38: library part RES_0402, "Resistor, ±1%, 0.063W", Part Number=R0402-7R15, Part number IPS=00000007806, Supplier Part Number 1=541-7.15LLCT-ND, Artikkelnr Noca=N.A., ComponentLink1Description=Datasheet, ComponentLink2Description="Supplier link", Footprint Doc=0402, LatestRevisionDate=2016-09-22, Note="Chip Res 1%", Pin Count=2, Published=2016-09-22, Publisher="Nordic Semiconductor", Supplier 1=Digi-Key
R26 R27 R28 R34 R35 R36 R37 R47 R48: library part RES_0201, "Resistor, ±1%, 0.05W", Part Number=R0201-3k0, Part number IPS=00000001688, Artikkelnr Noca=N.A., ComponentLink1Description=Datasheet, ComponentLink2Description="Supplier link", Footprint Doc=0201, LatestRevisionDate=2014-11-13, Note="Chip Res 1%", Pin Count=2, Published=2014-11-13, Publisher="Nordic Semiconductor"
SW1: library part CL-SB-22A-11T, "SMD slide Switch (ON-ON)", Manufacturer="Copal Electronics Inc", Part Number=Switch-Slide-RA-J-Lead-DPDT-8.5x3.5mm_Copal, Part number IPS=00000007811, Supplier Part Number 1=563-1340-1-ND, Artikkelnr Noca=N.A., ComponentLink1Description=Datasheet, ComponentLink2Description="Supplier link", Footprint Doc=Switch-Slide-RA-J-Lead-DPDT-8.5x3.5mm, HelpURL=http://www.nidec-copal-electronics.com/e/catalog/switch/cl-sb.pdf, LatestRevisionDate=2017-02-01, Manufacturer Part Number=CL-SB-22A-11T, Pin Count=6, Published=2017-02-01, Publisher="Nordic Semiconductor", Supplier 1=Digi-Key, Supplier 2=Avnet, Supplier Part Number 2=CL-SB-22A-11T
SW3: library part TS604VM1-025BR-R, "Tactile Switch, SPNO, SMD, 160gf, 6.2x6.3x2.5mm", Manufacturer=Dailywell, Part Number=Switch-PB-6.2x6.3mm-SMD, Part number IPS=00000007812, Artikkelnr Noca=50019106, ComponentLink1Description=Datasheet, ComponentLink2Description="Supplier link", Footprint Doc=Switch-PB-6.2x6.3mm-SMD, HelpURL=\\hizz\pro\app9717\Datasheet\switches\Dailywell\TS604VM1-025BR-R.pdf, LatestRevisionDate=2016-04-21, Manufacturer Part Number=TS604VM1-025BR-R, Pin Count=4, Published=2010-02-01, Publisher="Nordic Semiconductor", Supplier 1=Cabcon, Supplier 2=Mouser, Supplier Part Number 1=TS604VM1-025BR-R, Supplier Part Number 2=688-SKHUALE010
TP1 TP2 TP3 TP5 TP6 TP7 TP8 TP9 TP10: library part TP_SMD_Ø1.0MM, "1.0mm circular SMD testpad", Manufacturer="Nordic Semiconductor", Part number IPS=N.A., Artikkelnr Noca=N.A., ComponentLink1Description=Datasheet, ComponentLink2Description="Supplier link", Footprint Doc=TP_SMD_Ø1.0mm, LatestRevisionDate=2013-06-11, Part Number=TP_SMD_Ø1.0MM, Pin Count=1, Published=2013-06-11, Publisher="Nordic Semiconductor"
U1: library part nRF9160_SICA, "Low power System-in-Package with integrated LTE-M/NB-IoT modem and GPS", Manufacturer="Nordic Semiconductor", Part number IPS=N.A., Artikkelnr Noca=N.A., ComponentLink1Description=Datasheet, ComponentLink2Description="Supplier link", Footprint Doc=LGA-161, LatestRevisionDate=2019-02-14, Manufacturer Part Number=nRF9160-SICA, Part Number=nRF9160-SICA, Pin Count=161, Published=2019-02-14, Publisher="Nordic Semiconductor", Supplier 1="Nordic Semiconductor", Supplier Part Number 1=nRF9160-SICA
U2 U3: "SP8T Switch For 3G/4G Applications", Manufacturer=Qorvo, Part number IPS=80000001821, Artikkelnr Noca=N.A., ComponentLink1Description=Datasheet, ComponentLink1URL="\\hizz\pro\app9717\Datasheet\integated circuits\qorvo\QM12038 Datasheet.pdf", ComponentLink2Description="Supplier link", Footprint Doc=UFQFN-14, LatestRevisionDate=2018-09-18, Manufacturer Part Number=QM12038, Part Number=QM12038, Pin Count=14, Published=2018-09-18, Publisher="Nordic Semiconductor"
U4: "GPS, GLONASS, and BeiDou Low Noise Amplifier With Integrated Output SAW Filter, 1.55 to 1.61 GHz, 13.5 dB", Manufacturer=Qorvo, Part number IPS=80000001649, Artikkelnr Noca=N.A., ComponentLink1Description=Datasheet, ComponentLink1URL="\\hizz\pro\app9717\Datasheet\integated circuits\qorvo\QM14501 Datasheet.pdf", ComponentLink2Description="Supplier link", Footprint Doc=QM14501, HelpURL=https://www.rfmw.com/Products/Detail/QM14501-Qorvo/597159/, LatestRevisionDate=2018-10-22, Manufacturer Part Number=QM14501, Part Number=QM14501, Pin Count=12, Published=2018-01-16, Publisher="Nordic Semiconductor"
U5: library part 1G11, "Single 3-input AND gate", Manufacturer="ON Semiconductor", Part number IPS=00000001709, Supplier Part Number 1=NC7SV11L6XCT-ND, Artikkelnr Noca=N.A., ComponentLink1Description=Datasheet, ComponentLink1URL=https://www.fairchildsemi.com/datasheets/NC/NC7SV11.pdf, ComponentLink2Description="Supplier link", Footprint Doc=UFDFN-6, HelpURL=https://www.fairchildsemi.com/datasheets/NC/NC7SV11.pdf, LatestRevisionDate=2018-09-27, Manufacturer Part Number=NC7SV11L6X, Note="Single 3-input AND gate", Part Number=NC7SV11L6X, Pin Count=6, Published=2018-09-27, Publisher="Nordic Semiconductor", Supplier 1=Digi-Key, Supplier 2=Mouser, Supplier Part Number 2=512-NC7SV11L6X
U7: "Micropower, 3-Axis, ±200g digital output acelerometer", Manufacturer="Analog Devices", Part number IPS=00000001798, Supplier Part Number 1=ADXL372BCCZ-RL7CT-ND, Artikkelnr Noca=N.A., ComponentLink1Description=Datasheet, ComponentLink1URL=http://www.analog.com/media/en/technical-documentation/data-sheets/ADXL372.pdf, ComponentLink2Description="Supplier link", ComponentLink2URL=http://www.analog.com/en/products/adxl372.html, Footprint Doc=LGA-16, HelpURL=http://www.analog.com/en/products/adxl372.html, LatestRevisionDate=2018-08-24, Manufacturer Part Number=ADXL372, Part Number=ADXL372, Pin Count=16, Published=2018-08-24, Publisher="Nordic Semiconductor", Supplier 1=Digi-Key
U8: "Micropower, 3-Axis, ±2 g/±4 g/±8 g Digital Output MEMS Accelerometer", Manufacturer="Analog Devices", Part number IPS=00000001799, Supplier Part Number 1=ADXL362BCCZ-RL7CT-ND, Artikkelnr Noca=N.A., ComponentLink1Description=Datasheet, ComponentLink1URL=http://www.analog.com/media/en/technical-documentation/data-sheets/ADXL362.pdf, ComponentLink2Description="Supplier link", ComponentLink2URL=http://www.analog.com/en/products/adxl362.html, Footprint Doc=LGA-16, HelpURL=https://www.analog.com/media/en/technical-documentation/data-sheets/ADXL362.pdf, LatestRevisionDate=2019-01-11, Manufacturer Part Number=ADXL362, Part Number=ADXL362, Pin Count=16, Published=2019-01-11, Publisher="Nordic Semiconductor", Supplier 1=Digi-Key, Supplier 2=Mouser, Supplier Part Number 2=584-ADXL362BCCZ-R7
U9: "Low power gas, pressure, temperature & humidity sensor", Manufacturer=Bosch, Part number IPS=00000001800, Supplier Part Number 1=828-1077-1-ND, Artikkelnr Noca=N.A., ComponentLink1Description=Datasheet, ComponentLink1URL=https://ae-bst.resource.bosch.com/media/_tech/media/datasheets/BST-BME680-DS001-00.pdf, ComponentLink2Description="Supplier link", Footprint Doc=LGA-8, LatestRevisionDate=2018-05-24, Manufacturer Part Number=BME680, Part Number=BME680, Pin Count=8, Published=2018-05-24, Publisher="Nordic Semiconductor", Supplier 1=Digi-Key
U11: "Advanced Battery Management PMIC With Ultralow Iq Buck and Buck-Boost", Manufacturer="Analog Devices", Part number IPS=80000001823, Artikkelnr Noca=N.A., ComponentLink1Description=Datasheet, ComponentLink2Description="Supplier link", Footprint Doc=WLCSP-32, LatestRevisionDate=2019-03-25, Manufacturer Part Number=ADP536x, Part Number=ADP536x, Pin Count=32, Published=2019-03-25, Publisher="Nordic Semiconductor"

## Free pads (board coordinates)
  round 2 smd mask+0: 2(3.15,3.15) 2(3.15,46.85) 3(46.85,3.15)
  round 0 hole 1 unplated: Hole1(1.6,48.4) Hole2(1.6,1.6) Hole3(48.4,1.6)
  round 0 hole 1 unplated mask+0.05: Hole4(48.4,48.4)

## Via types
v1: diameter 0.8, hole 0.4, Int2 (PWR) to Bottom Layer, 77 vias
v2: diameter 0.8 (per signal layer), hole 0.4, Top Layer to Int2 (PWR), 59 vias
v3: diameter 0.8, hole 0.4, Top Layer to Int1 (GND), 56 vias
v4: diameter 0.8, hole 0.4, Int1 (GND) to Bottom Layer, 53 vias
v5: diameter 0.8, hole 0.4, Top Layer to Int2 (PWR), 18 vias
v6: diameter 0.3, hole 0.13, Top Layer to Bottom Layer, 10 vias
v7: diameter 0.8, hole 0.4, Top Layer to Bottom Layer, 8 vias
v8: diameter 0.5, hole 0.2, Top Layer to Bottom Layer, 2 vias
v9: diameter 0.8 (per signal layer), hole 0.4, Int1 (GND) to Bottom Layer, 2 vias
v10: diameter 0.3, hole 0.12, Top Layer to Bottom Layer, 1 vias

## Nets (pads, with @x,y where several pads share a name; then routed paths per layer and width w, separated by ;. In a path a pad name is that pad's centre, name@x,y a point inside that pad or via, vN(x,y) a via of type N, cw(c..) or ccw(c..) an arc to the next point about the centre after c; other vN are vias at no path point)
3V3: C48.2 C49.2 R31.1 U11.A3 U11.C1 | length 22.3
  Top Layer w0.1: U11.C1@28.915,10.5 26.4,10.5 25.45,11.45 25.45,13.95 27.3,15.8 v2(29,15.8) 29,14.8 29.1,14.7 29.7,14.1 29.8,14 U11.A3@29.8,11.3
  Bottom Layer w0.1: C49.2@26.3,14.175 26.35,14.125 28.025,14.125 28.9,15 28.9,15.7 v2(29,15.8) 29,17.025 C48.2@29.1,17.125 ; R31.1@27.1,3.5 27.3,3.5 28.2,4.4 v1(28.3,4.4)
  other v1: 29,15.8
ANT_GPS: C13.2 J2.3 L3.1 | length 24.8
  Top Layer w0.1: v1(17.7,31) 17.8,30.9 20.2,30.9 22.046,29.054 22.046,22.354 22.9,21.5 v2(22.9,21.2) ; J2.3@19.7,13.96 19.7,14.4 20.6,15.3 v2(20.6,16.6)
  Bottom Layer w0.1: L3.1@16.5,32.015 17.515,32.015 C13.2@17.6,32.1 17.7,32 v1(17.7,31) ; 17.4,32.4 17.8,32.4 ; v2(20.6,16.6) 20.6,16.849 20.575,16.875 20.604,16.904 20.608,18.096 ccw(c19.904,18.1) 20.608,18.105 20.604,19.121 20.604,19.204 20.633,19.233 22.6,21.2 v2(22.9,21.2)
  other v1: 20.6,16.6 22.9,21.2
  other v2: 17.7,31
ANT_LTE: A1.1 C15.2 L8.1 U3.13 | length 26.9
  Top Layer w0.1: A1.1@2.2,43.3 A1.1@3.4,42.1 ; A1.1@2.2,43.3 A1.1@2,43.3 ; A1.1@3,44.3 A1.1@2,43.3 ; U3.13@15,35.745 15,40.4 14.7,40.7 14.315,40.7 L8.1@14.3,40.685 13.315,40.685 C15.2@13.3,40.7 13.3,44.5 12.5,45.3 2.5,45.3 2,44.8 A1.1@2,43.3
BSNS: C50.2 SW1.6 TP8.1 U11.C6 U11.D6 | length 22.9
  Top Layer w0.1: U11.D6@31,10.1 U11.C6@31,10.4 ; U11.C6@31.009,10.491 33.278,10.491 35,8.769 v2(35,7.8) ; v2(41.2,8.2) 41.2,8.1 43.607,5.693 43.607,3.893 SW1.6@43.8,3.7
  Bottom Layer w0.1: C50.2@35.9,5.775 35.952,5.827 35.952,6.848 v2(35,7.8) 35.404,8.204 39.026,8.204 39.03,8.2 v2(41.2,8.2) 43.056,8.2 43.356,7.9 TP8.1@43.6,7.9
  other v1: 35,7.8 41.2,8.2
CLK_1: D3.C2 J4.C3 | length 15.8
  Top Layer w0.1: J4.C3@37.95,18.145 38.345,18.145 39.885,19.685 39.885,19.689 42.587,22.392 44.588,22.392 46.677,24.481 v1(48.696,26.5)
  Bottom Layer w0.1: D3.C2@47.435,25.65 47.464,25.679 47.879,25.679 48.696,26.496 v1(48.696,26.5)
  other v5: 48.696,26.5
DATA_1: D3.C3 J4.C7 | length 14.6
  Top Layer w0.1: J4.C7@41.12,18.245 41.275,18.4 46.5,18.4 47.4,19.3 47.4,23.8 v5(48.8,25.2)
  Bottom Layer w0.1: D3.C3@47.435,25.15 47.485,25.2 v5(48.8,25.2)
  other v1: 48.8,25.2
EN1: R30.2 U11.E2 | length 3.3
  Bottom Layer w0.1: R30.2@28.2,6.9 28.2,7.896 29.4,9.096 v10(29.4,9.7)
EN2: R32.2 U11.B4 | length 3.3
  Bottom Layer w0.1: v6@30.2,10.985 30.2,13.5 30.438,13.738 30.837,13.738 R32.2@30.9,13.8
  other v6: 30.2,10.9
ENGHG: R29.2 U11.F3 | length 2.9
  Top Layer w0.1: v1(29.2,7.9) 29.8,8.5 U11.F3@29.8,9.3
  Bottom Layer w0.1: v1(29.2,7.9) 29.2,6.9 R29.2@29.4,6.7
  other v2: 29.2,7.9
ENSD: R33.1 R35.2 U11.B3 | length 8.3
  Bottom Layer w0.1: v6@29.791,10.909 29.791,16.611 29.995,16.815 30,16.815 30.7,17.515 30.7,17.53 30.785,17.615 R35.2@30.8,17.615 31.985,17.615 R33.1@32,17.6
  other v6: 29.8,10.9
GND: C1.1 C2.1 C3.1 C4.1 C5.1 C6.1 C7.1 C8.1 C12.1 C13.1 C14.1 C16.1 C17.1 C36.1 C37.1 C38.1 C39.1 C40.1 C41.1 C43.1 C44.1 C46.1 C47.1 C48.1 C49.1 C50.1 C51.1 C52.1 C53.1 C54.1 D2.1 D3.B1 D3.B2 J1.2 J2.2 J3.1 J4.0 J4.C5 J4.CSW L4.1 L5.1 L6.1 L7.1 P5.3 P5.5 P5.9 Q1A.1 Q8.2 R4.1 R5.1 R6.1 R12.1 R26.1 R32.1 R35.1 R36.1 R37.1 R48.1 SW3.2 TP6.1 U1.1 U1.5 U1.6 U1.7 U1.8 U1.9 U1.11 U1.14 U1.17 U1.21 U1.27 U1.31 U1.36 U1.41 U1.44 U1.47 U1.50 U1.52 U1.56 U1.60 U1.62 U1.63 U1.65 U1.66 U1.68 U1.69 U1.72 U1.74 U1.75 U1.76 U1.77 U1.78 U1.79 U1.80 U1.81 U1.82 U1.85 U1.90 U1.94 U1.98 U1.103 U2.15 U3.15 U4.2 U4.4 U4.5 U4.6 U4.7 U4.9 U4.10 U4.11 U5.2 U7.12 U7.13 U7.16 U8.12 U8.13 U8.16 U9.1 U9.5 U9.7 U11.A1 U11.B2 U11.F1 U11.F4 | length 193.3
  Top Layer w0.1: Q1A.1@13.255,2.775 13.255,4.055 v3(13.291,4.091) ; v3(15.203,11.303) 15.203,11.28 15.883,10.6 U5.2@16.2,10.6 ; v3(18.2,45.8) 19.56,45.8 P5.9@19.565,45.805 19.565,46.44 20.779,47.654 22.346,47.654 23,47 ; U4.9@19.125,9.675 U4.10@19.125,9.001 U4.11@19.125,8.309 19.692,8.309 19.9,8.517 19.9,7.517 ; U4.2@19.9,6.925 19.9,7.517 ; 20.05,7.667 19.9,7.517 ; U4.5@20.675,8.309 U4.6@20.675,9.001 U4.7@20.675,9.675 v3(21.583,9.675) ; P5.5@22.105,45.805 P5.5@22.105,46.44 ; J1.2@22.55,17.675 22.675,17.8 23.3,17.8 ; U1.56@23.654,31.454 U1.56@23.7,31.5 ; U1.72@23.68,23.4 23.68,22.921 23.9,22.7 24.541,22.7 24.754,22.913 24.754,23.354 24.8,23.4 U1.76@25.8,23.4 ; U1.69@23.68,25.02 23.68,25.52 25.35,25.52 U1.103@25.55,25.32 ; U1.63@23.68,28.02 23.68,28.52 26.58,28.52 v3@26.6,28.5 ; U1.60@23.68,29.52 26.52,29.52 v3@26.6,29.6 ; U1.56@23.68,31.52 23.726,31.474 25.626,31.474 U1.103@25.8,31.3 ; U1.52@23.68,33.64 23.846,33.806 23.846,34.036 24.11,34.3 24.5,34.3 24.754,34.046 24.754,33.686 24.8,33.64 24.8,32.47 U1.103@25.55,31.72 ; U1.66@23.7,26.5 U1.65@23.7,27 25.47,27 U1.103@25.57,26.9 ; U1.63@23.7,28 U1.63@23.746,27.954 ; U1.103@25.23,25.26 25.25,25.24 25.27,25.26 25.77,25.26 25.8,25.23 U1.76@25.8,23.4 ; U1.103@25.52,27.18 25.645,27.055 U1.103@25.61,27.02 ; U1.47@26.3,33.64 26.3,31.8 v3@26.4,31.7 ; U1.103@27.27,25.26 U1.103@27.77,25.26 ; U1.44@27.82,33.62 27.866,33.666 27.866,34.017 29.249,35.4 30.4,35.4 v3(30.5,35.5) ; v3@28,9.146 v3(28,8.9) 28.024,8.9 28.424,9.3 28.915,9.3 ccw(c29,9.7) 28.991,9.291 U11.F1@29,9.3 ; v3(28.6,13.7) 28.991,13.309 28.991,11.309 U11.A1@29,11.3 ; U1.82@28.8,23.4 U1.76@25.8,23.4 ; U1.103@29.55,31.72 29.3,31.97 29.3,33.64 29.346,33.686 29.346,34.036 29.71,34.4 31.39,34.4 31.754,34.036 31.754,33.686 U1.36@31.8,33.64 ; 30.2,6.4 U11.F4@30.2,9.3 ; 30.2,25.3 30.3,25.2 U1.85@30.3,23.4 ; J3.1@31.75,4.4 32,4.65 J3.1@32,4.775 ; U1.90@32.8,23.4 32.846,23.354 32.846,23.004 33.35,22.5 34.3,22.5 34.754,22.954 ; v5(34.2,15.2) 35.235,15.2 35.95,14.485 J4.0@36.1,14.485 40.615,14.485 41.12,13.98 J4.C5@41.12,13.165 ; 34.2,31.8 34.3,31.9 U1.31@34.3,33.53 ; U1.31@34.27,33.5 U1.31@34.3,33.53 ; U1.31@34.316,33.546 U1.31@34.3,33.53 ; 34.8,25.2 34.8,23.4 34.754,23.354 34.754,22.954 ; U1.27@36.3,33.64 36.3,35 35.8,35.5 34.9,35.5 34.3,34.9 U1.31@34.3,33.53 ; U1.98@36.8,23.4 36.754,23.354 36.754,23.004 36.25,22.5 35.154,22.5 34.754,22.9 34.754,22.954 ; J4.0@37.25,9.125 J4.0@37.399,9.125 ; J4.0@37.25,20.3 36.275,20.3 36.1,20.125 J4.0@36.1,16.925 38.425,16.925 41.484,19.984 41.484,20.125 42.759,21.4 44.5,21.4 ; U8.16@37.429,46.454 U8.16@37.475,46.5 ; J4.0@37.574,9.3 J4.0@37.399,9.125 ; v3@37.6,43.8 v3(37.7,43.7) ; v3(38.8,34.996) 39.44,34.356 U1.21@39.44,33.62 ; U1.5@39.42,25.52 39.42,27.52 39.446,27.546 40.046,27.546 40.7,28.2 40.7,28.487 40.641,28.546 39.486,28.546 U1.11@39.44,28.5 39.09,28.5 38.8,28.79 38.8,29.75 39.024,29.974 39.026,29.974 ; U1.14@39.42,30.02 39.374,29.974 39.026,29.974 ; U1.17@39.42,31.52 39.374,31.474 39.024,31.474 38.8,31.25 38.8,30.2 39.026,29.974 ; U1.1@39.44,23.38 39.606,23.546 39.838,23.546 42.6,26.308 v3(42.6,27.1) ; U7.12@41.254,44.766 U7.12@41.3,44.812 U7.13@41.8,44.812 ; v3@41.9,43.8 42,43.7 v3(42,43.6) ; U7.16@42.029,46.554 U7.16@42.075,46.6 ; J4.CSW@44.525,20 J4.CSW@44.45,20.075 44.45,21.35 44.5,21.4 ; v3(44.958,28.6) 44.958,28.658 45.4,29.1 45.85,29.1 D2.1@46.2,29.45 47.775,29.45 48,29.675 R12.1@48,29.7 ; U9.5@45.8,47 U9.5@45.891,46.909 ; J4.0@46.25,19.8 46.25,20.85 45.7,21.4 44.5,21.4 ; J4.0@47.25,9.125 J4.0@42.1,9.125 ; J4.0@49.2,17.905 J4.0@49.2,13.505 49.2,13.365 49,13.165 J4.C5@41.12,13.165 ; J4.0@37.399,9.125 J4.0@42.1,9.125 ; J4.C5@41.12,13.165 41.12,11.78 42.1,10.8 J4.0@42.1,9.125
  Bottom Layer w0.1: C16.1@13,12.4 C16.1@13.2,12.4 ; 14.1,13.9 14.108,13.908 14.108,18.905 C12.1@14.1,20.3 ; C5.1@14.2,10.5 15.4,10.5 16.3,9.6 C8.1@16.925,9.6 ; v8(15,34.9) 15,37.9 v4(15.7,38.6) ; L6.1@16.4,28.13 L6.1@16.415,28.13 ; v8(16.6,16.8) v4(18.5,16.8) ; v9(17.204,34.9) 17.6,34.504 C13.1@17.6,33.1 ; C46.1@24,5.325 C46.1@23.9,5.425 C47.1@25.1,5.425 ; R26.1@25.092,9.507 R26.1@25.1,9.515 ; C49.1@26.3,12.825 C49.1@26.466,12.659 ; R5.1@26.7,40.4 26.7,40.45 R5.1@26.85,40.45 ; C48.1@29,18.575 C48.1@29.1,18.475 ; R35.1@30.785,18.2 R35.1@30.8,18.185 ; v5(34.2,15.2) 34.2,15.153 34.352,15 34.352,14.965 v1@34.352,14.92 ; 36.6,4.5 36.604,4.504 36.604,6.596 36.6,6.6 ; C1.1@36.6,32.515 C1.1@36.615,32.515 ; Q8.2@38.62,6.555 Q8.2@38.65,6.525 ; 41.668,41.6 42.9,41.6 43.404,42.104 43.404,47.884 44.17,48.65 44.2,48.65 44.4,48.85 C41.1@44.4,48.9 ; C43.1@43.6,6.1 44.085,6.1 44.5,5.685 C44.1@44.9,5.685 C44.1@44.907,5.692 ; C54.1@46.2,22.7 46.2,22.65 C54.1@46.4,22.45 ; v9(46.4,21.2) C54.1@46.4,22.45 ; D3.B1@47,25.9 D3.B2@47,24.9 47,24.4 47,23.2 46.4,22.6 C54.1@46.4,22.45
  other v1: 34.2,15.2
  other v3: 31,5 30.6,5.8 19.8,13 23.4,18.6 43.8,21 44.6,21 45.4,21 28.6,25.8 32.6,25.8 36.6,25.8 26.6,26.6 30.6,26.6 34.6,26.6 28.6,27.4 32.6,27.4 36.6,27.4 26.6,28.2 30.6,28.2 34.6,28.2 40.645,28.542 28.6,29 32.6,29 36.6,29 26.6,29.8 30.6,29.8 34.6,29.8 28.6,30.6 32.6,30.6 36.6,30.6 26.6,31.4 30.6,31.4 34.6,31.4 48.6,35.4 49,36.2 48.6,37 49,37.8 48.6,41.8 49,42.6 48.6,43.4 49,44.2 45,45.8 45.8,45.8 44.6,46.6
  other v4: 20.2,3.4 21,3.4 21.8,3.4 24.2,3.4 30.6,5 31.4,5 46.6,6.6 47.4,6.6 48.2,6.6 37.4,7.4 38.2,7.4 23.8,9 24.2,9.8 23.8,10.6 13.8,11.4 14.2,12.2 27.8,12.2 28.6,12.2 14.6,13 30.6,16.2 30.6,21 31.4,21 32.2,21 31,21.8 31.8,21.8 32.6,21.8 32.2,22.6 33,22.6 33.8,22.6 32.6,23.4 33.4,23.4 34.2,23.4 33.8,24.2 34.6,24.2 35.4,24.2 19.8,25 34.2,25 35,25 35.8,25 14.6,25.8 17,25.8 35.4,25.8 36.2,25.8 16.6,26.6 37,30.6 36.6,31.4 27.8,41 28.6,41 35.4,41.8
  other v6: 29.4,10.9
GPS_EN: C7.2 Q1B.1 R7.1 | length 5.9
  Top Layer w0.1: Q1B.1@17.81,2.8 17.9,2.89 v2(17.9,5.6)
  Bottom Layer w0.1: v2(17.9,5.6) C7.2@19.9,5.6 R7.1@21,5.6
  other v1: 17.9,5.6
GPS_LNA: J2.1 L1.2 | length 5.5
  Top Layer w0.1: L1.2@16.43,7.5 16.43,7.83 19.7,11.1 J2.1@19.7,11.64
GPS_LNA_IN: L1.1 U4.1 | length 2.7
  Top Layer w0.1: L1.1@16.4,6.915 19.115,6.915 U4.1@19.125,6.925
GPS_RF: U1.67 U4.8 | length 20.3
  Top Layer w0.1: U4.8@19.9,9.675 19.9,9.971 25.4,15.471 25.4,20.7 22.754,23.346 22.754,25.404 23.304,25.954 23.654,25.954 U1.67@23.7,26
ICS: R37.2 U11.E5 | length 5.8
  Bottom Layer w0.1: v6(30.6,9.7) 31.099,9.7 34.1,12.701 R37.2@34.1,13.715
ILIM: R36.2 U11.D5 | length 4.9
  Bottom Layer w0.1: v6(30.6,10.1) 30.667,10.1 30.692,10.125 30.968,10.125 33.3,12.457 R36.2@33.3,13.715